# Altium PCB Motor1.PcbDoc (part 1 of 2)
Units mm, origin at the board's own origin, x right, y up, seen from the top; angles counter-clockwise.
Board outline 127 x 101.6 mm, 4 copper layers (Top Layer, Internal Plane 1, Internal Plane 2, Bottom Layer), stack 0.462 mm thick; 168 components, 160 nets, 542 pads, 14 vias.
Unrouted connection lines stored in the file: 162.
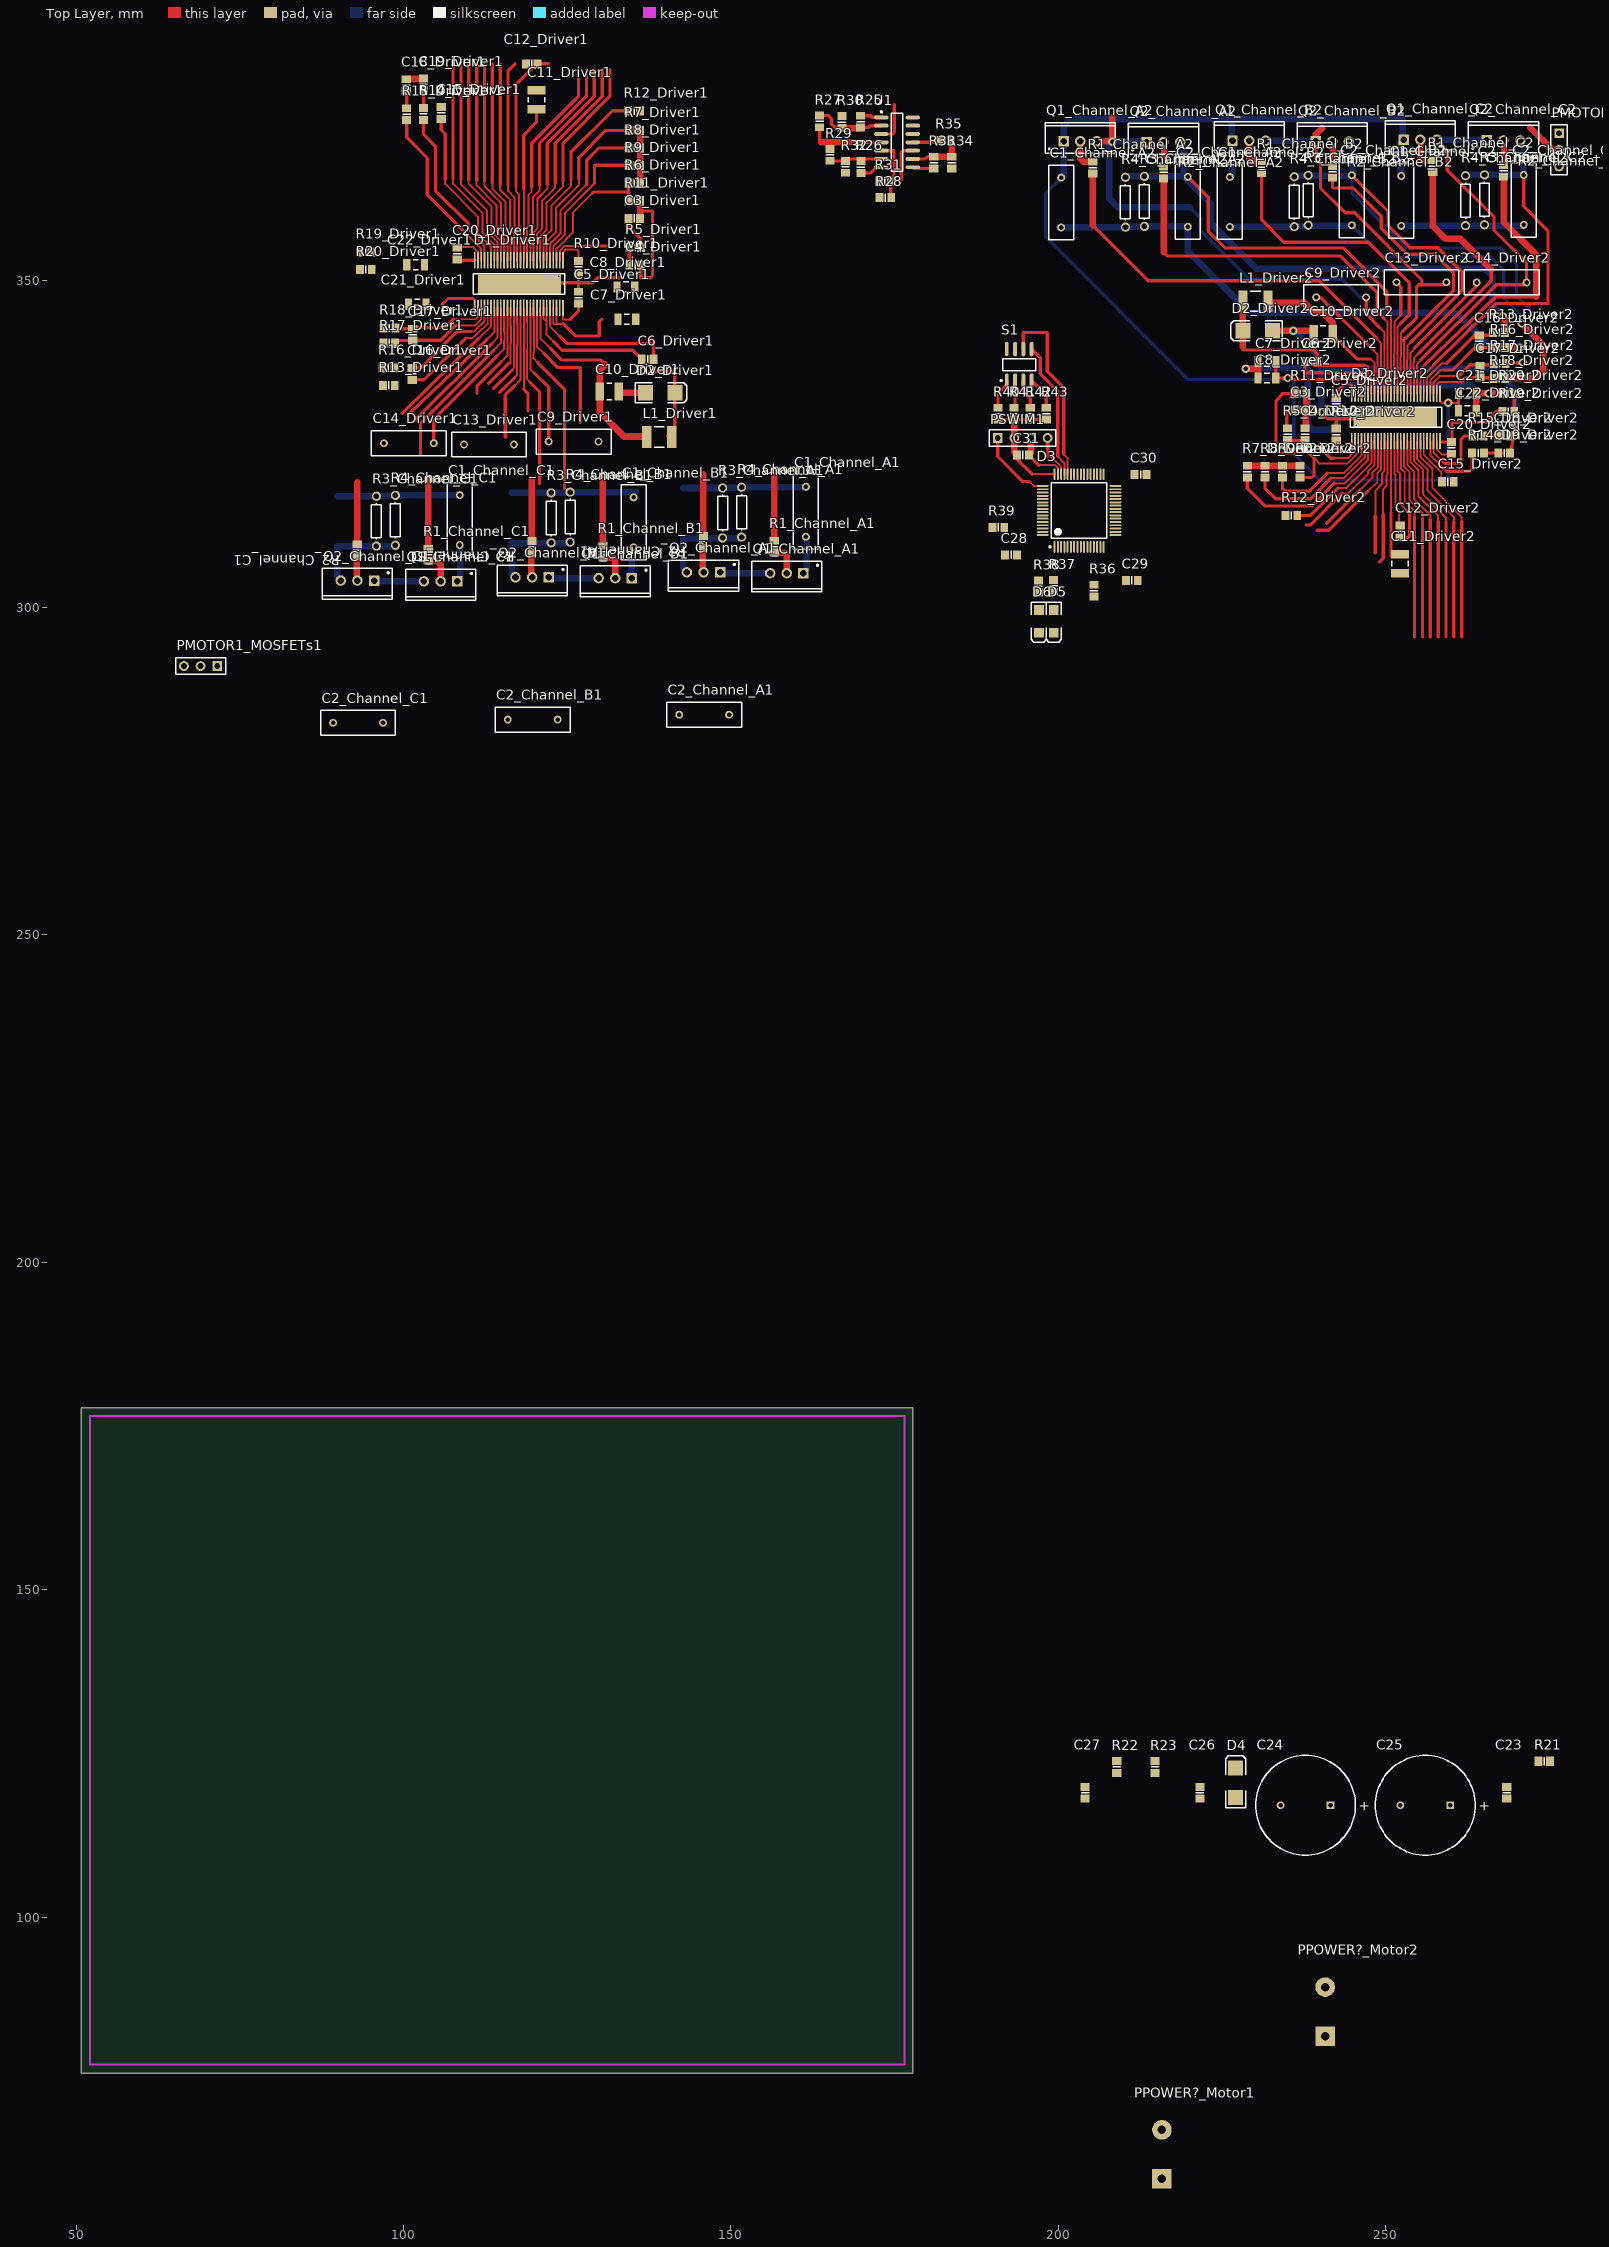
[diagram p0: Top Layer view]
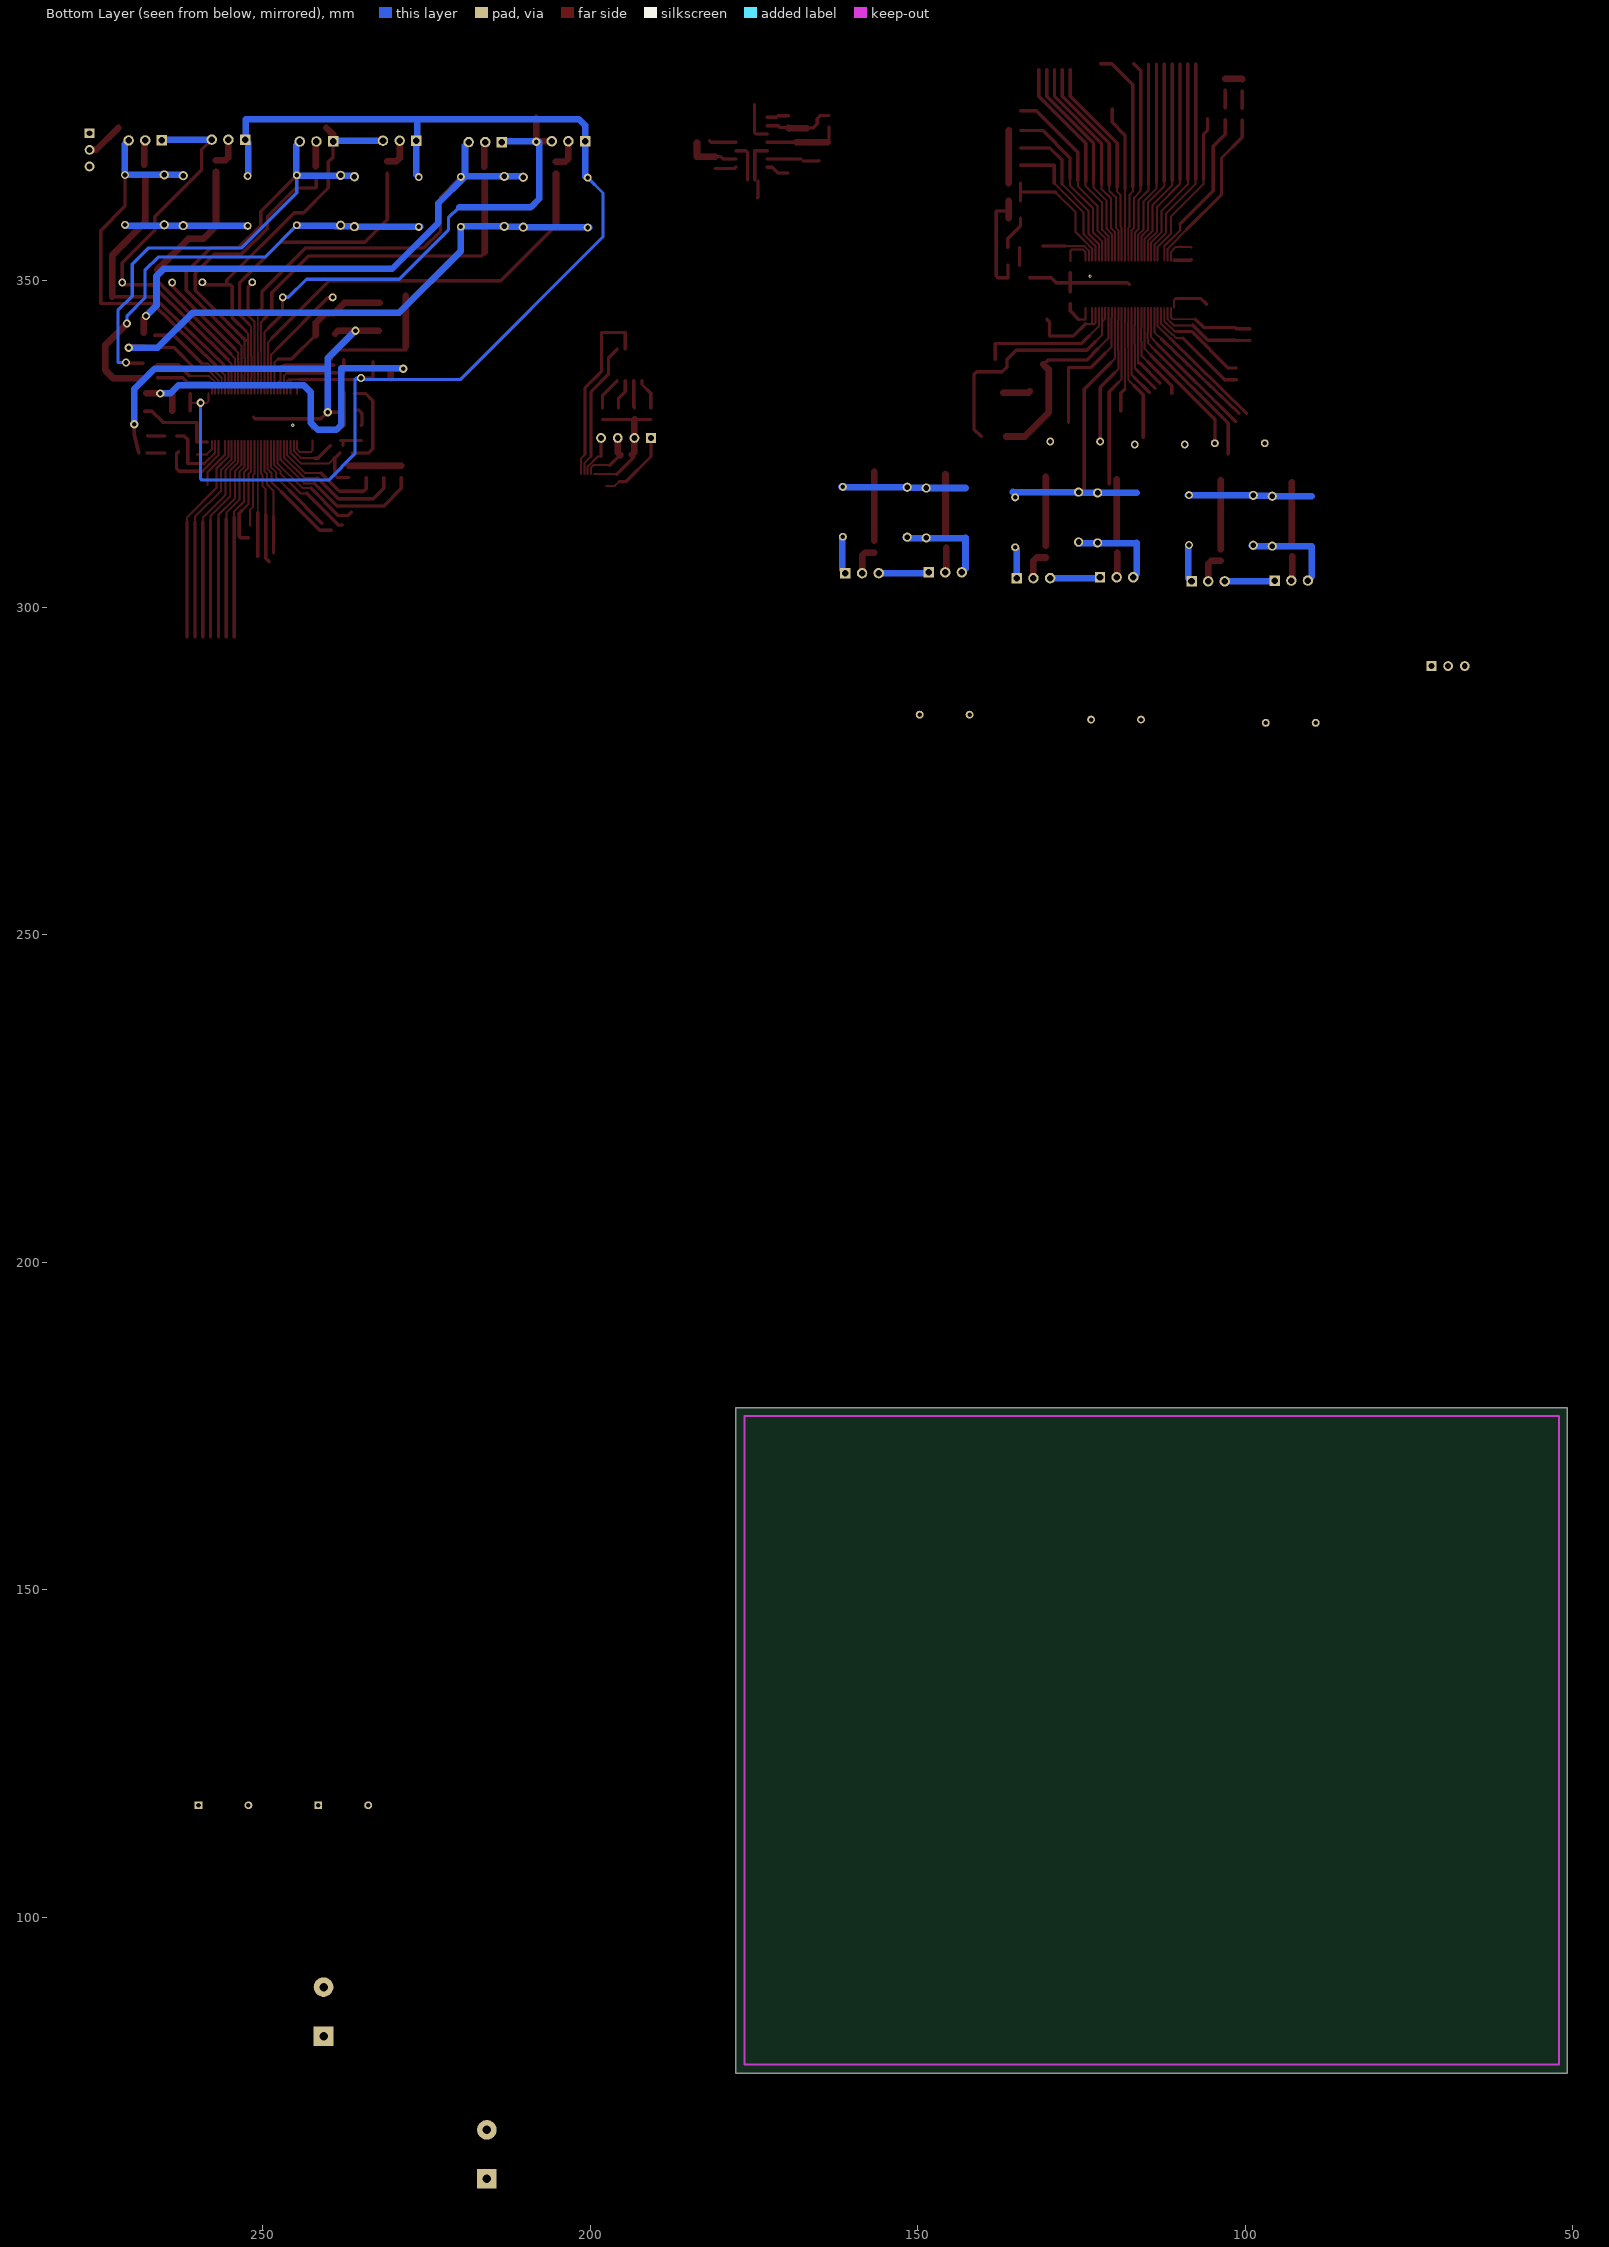
[diagram p1: Bottom Layer view, seen from below]
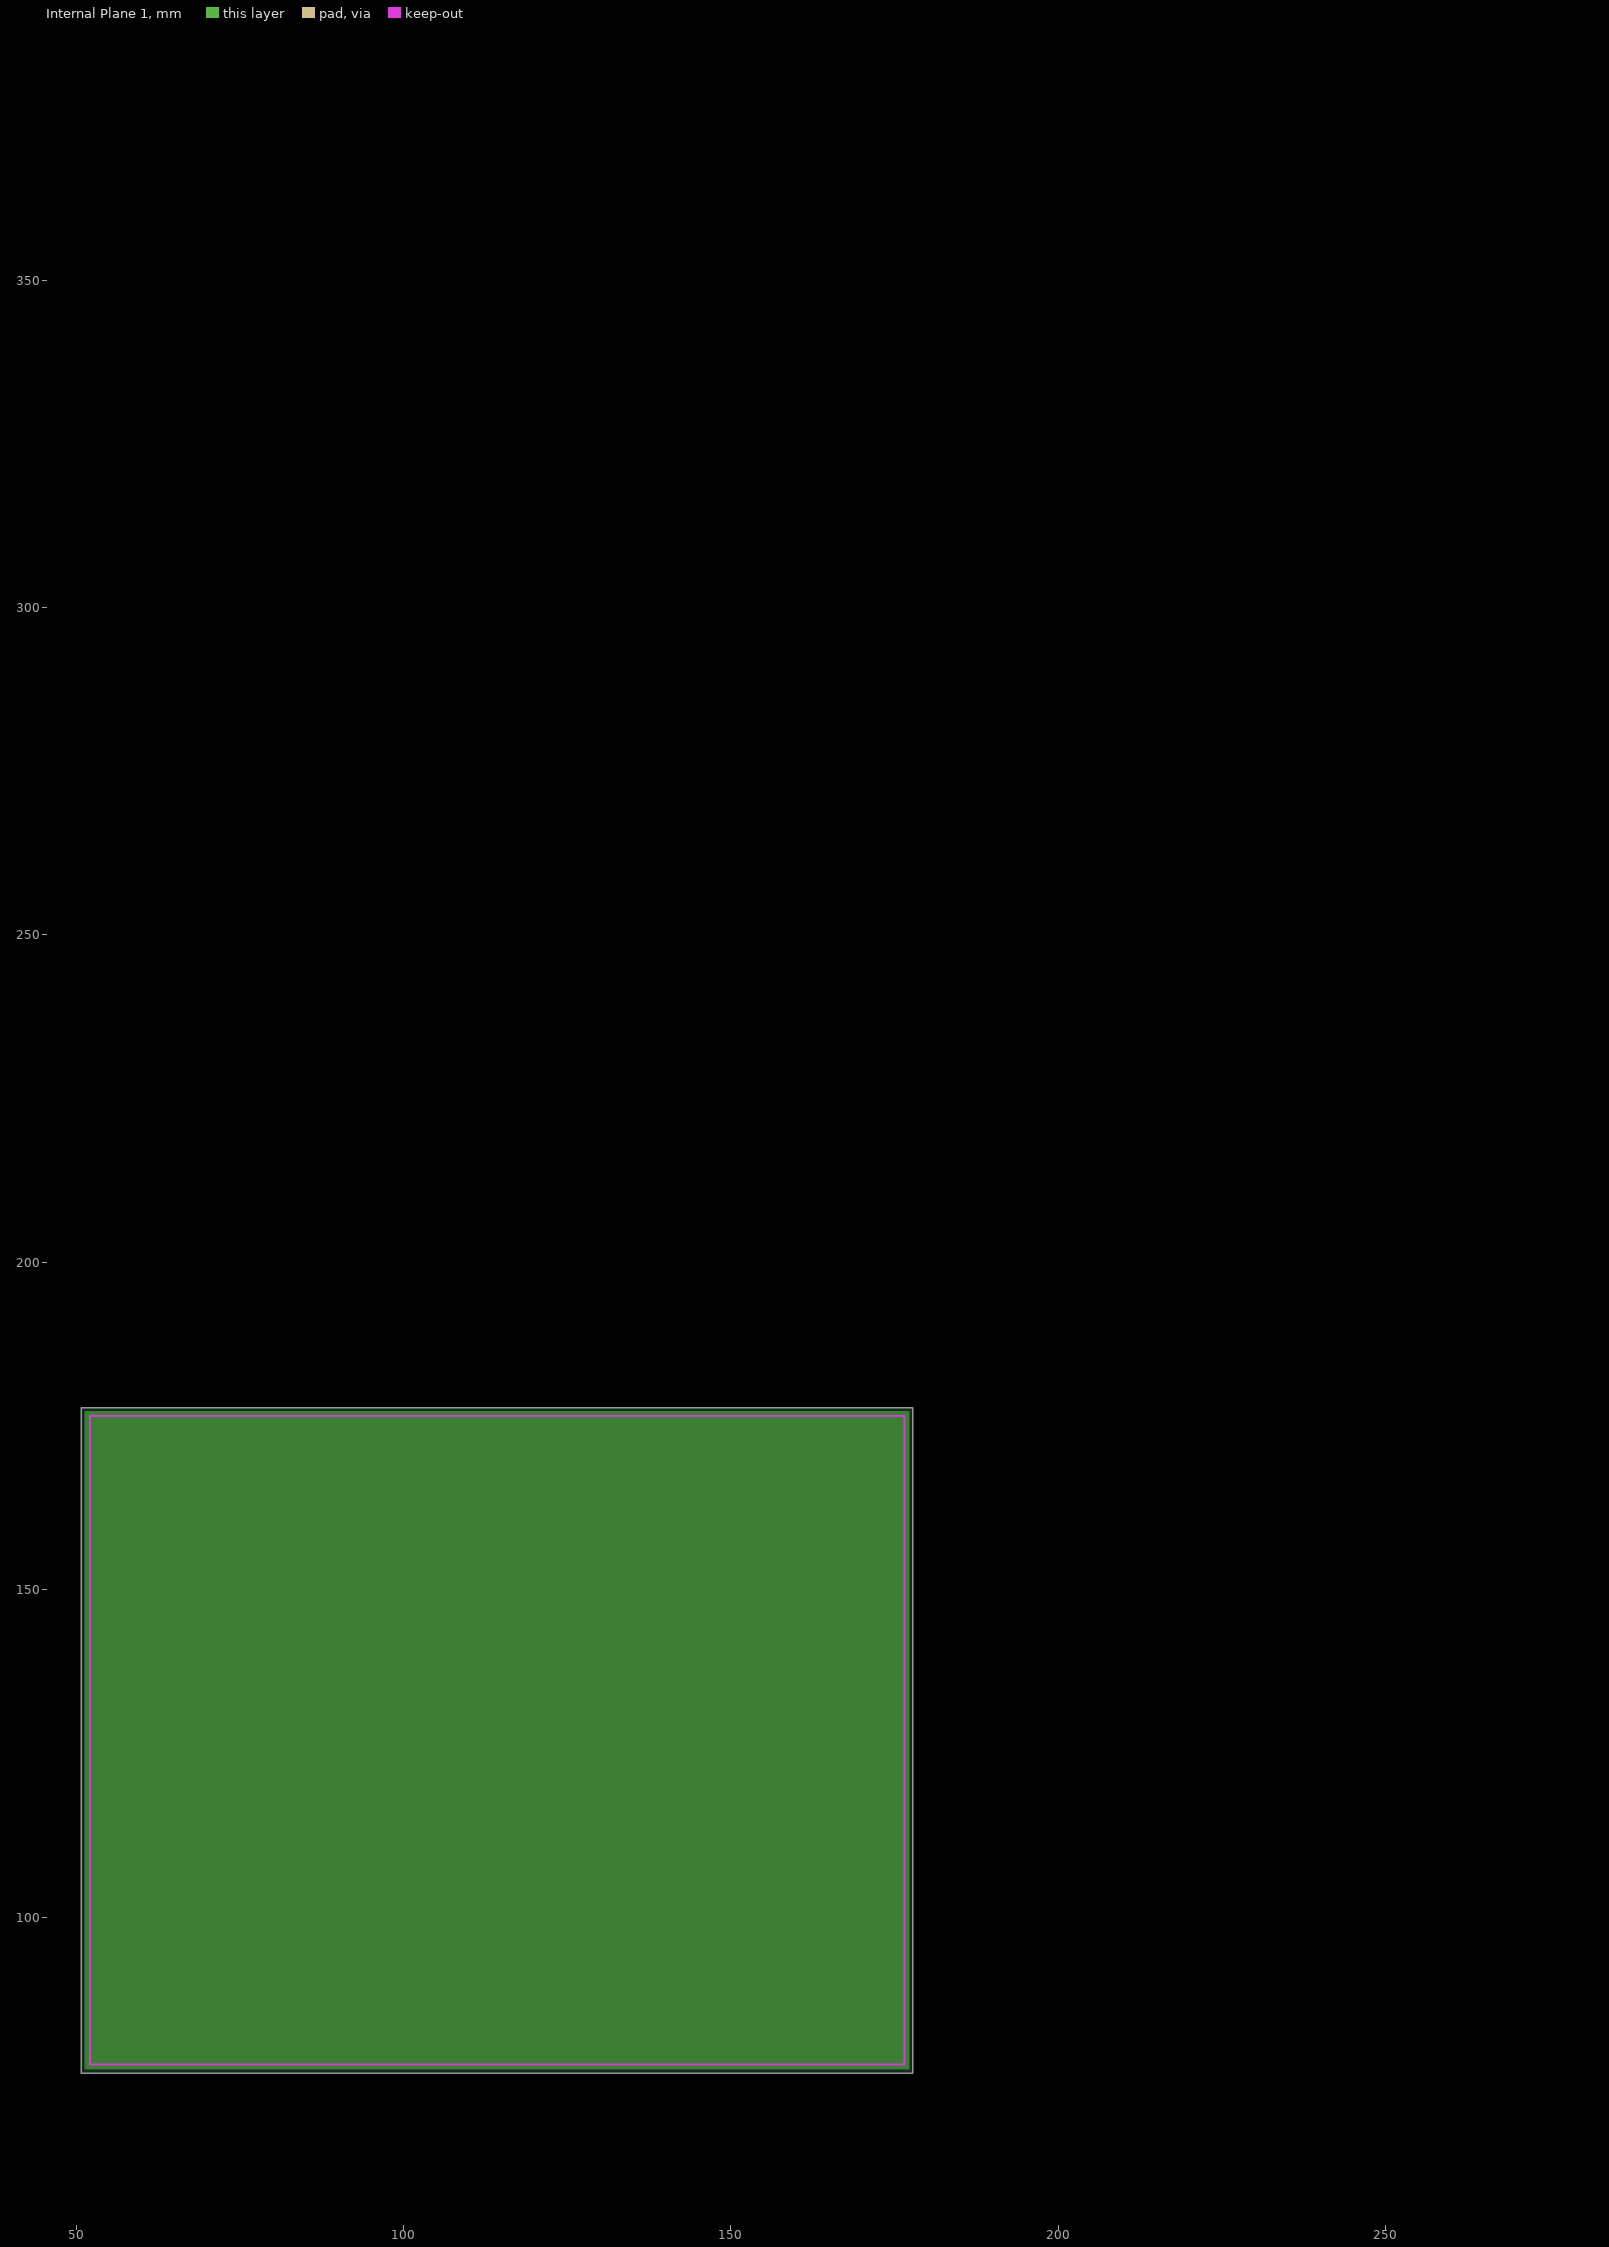
[diagram p2: Internal Plane 1, clearances drawn from the general rule]
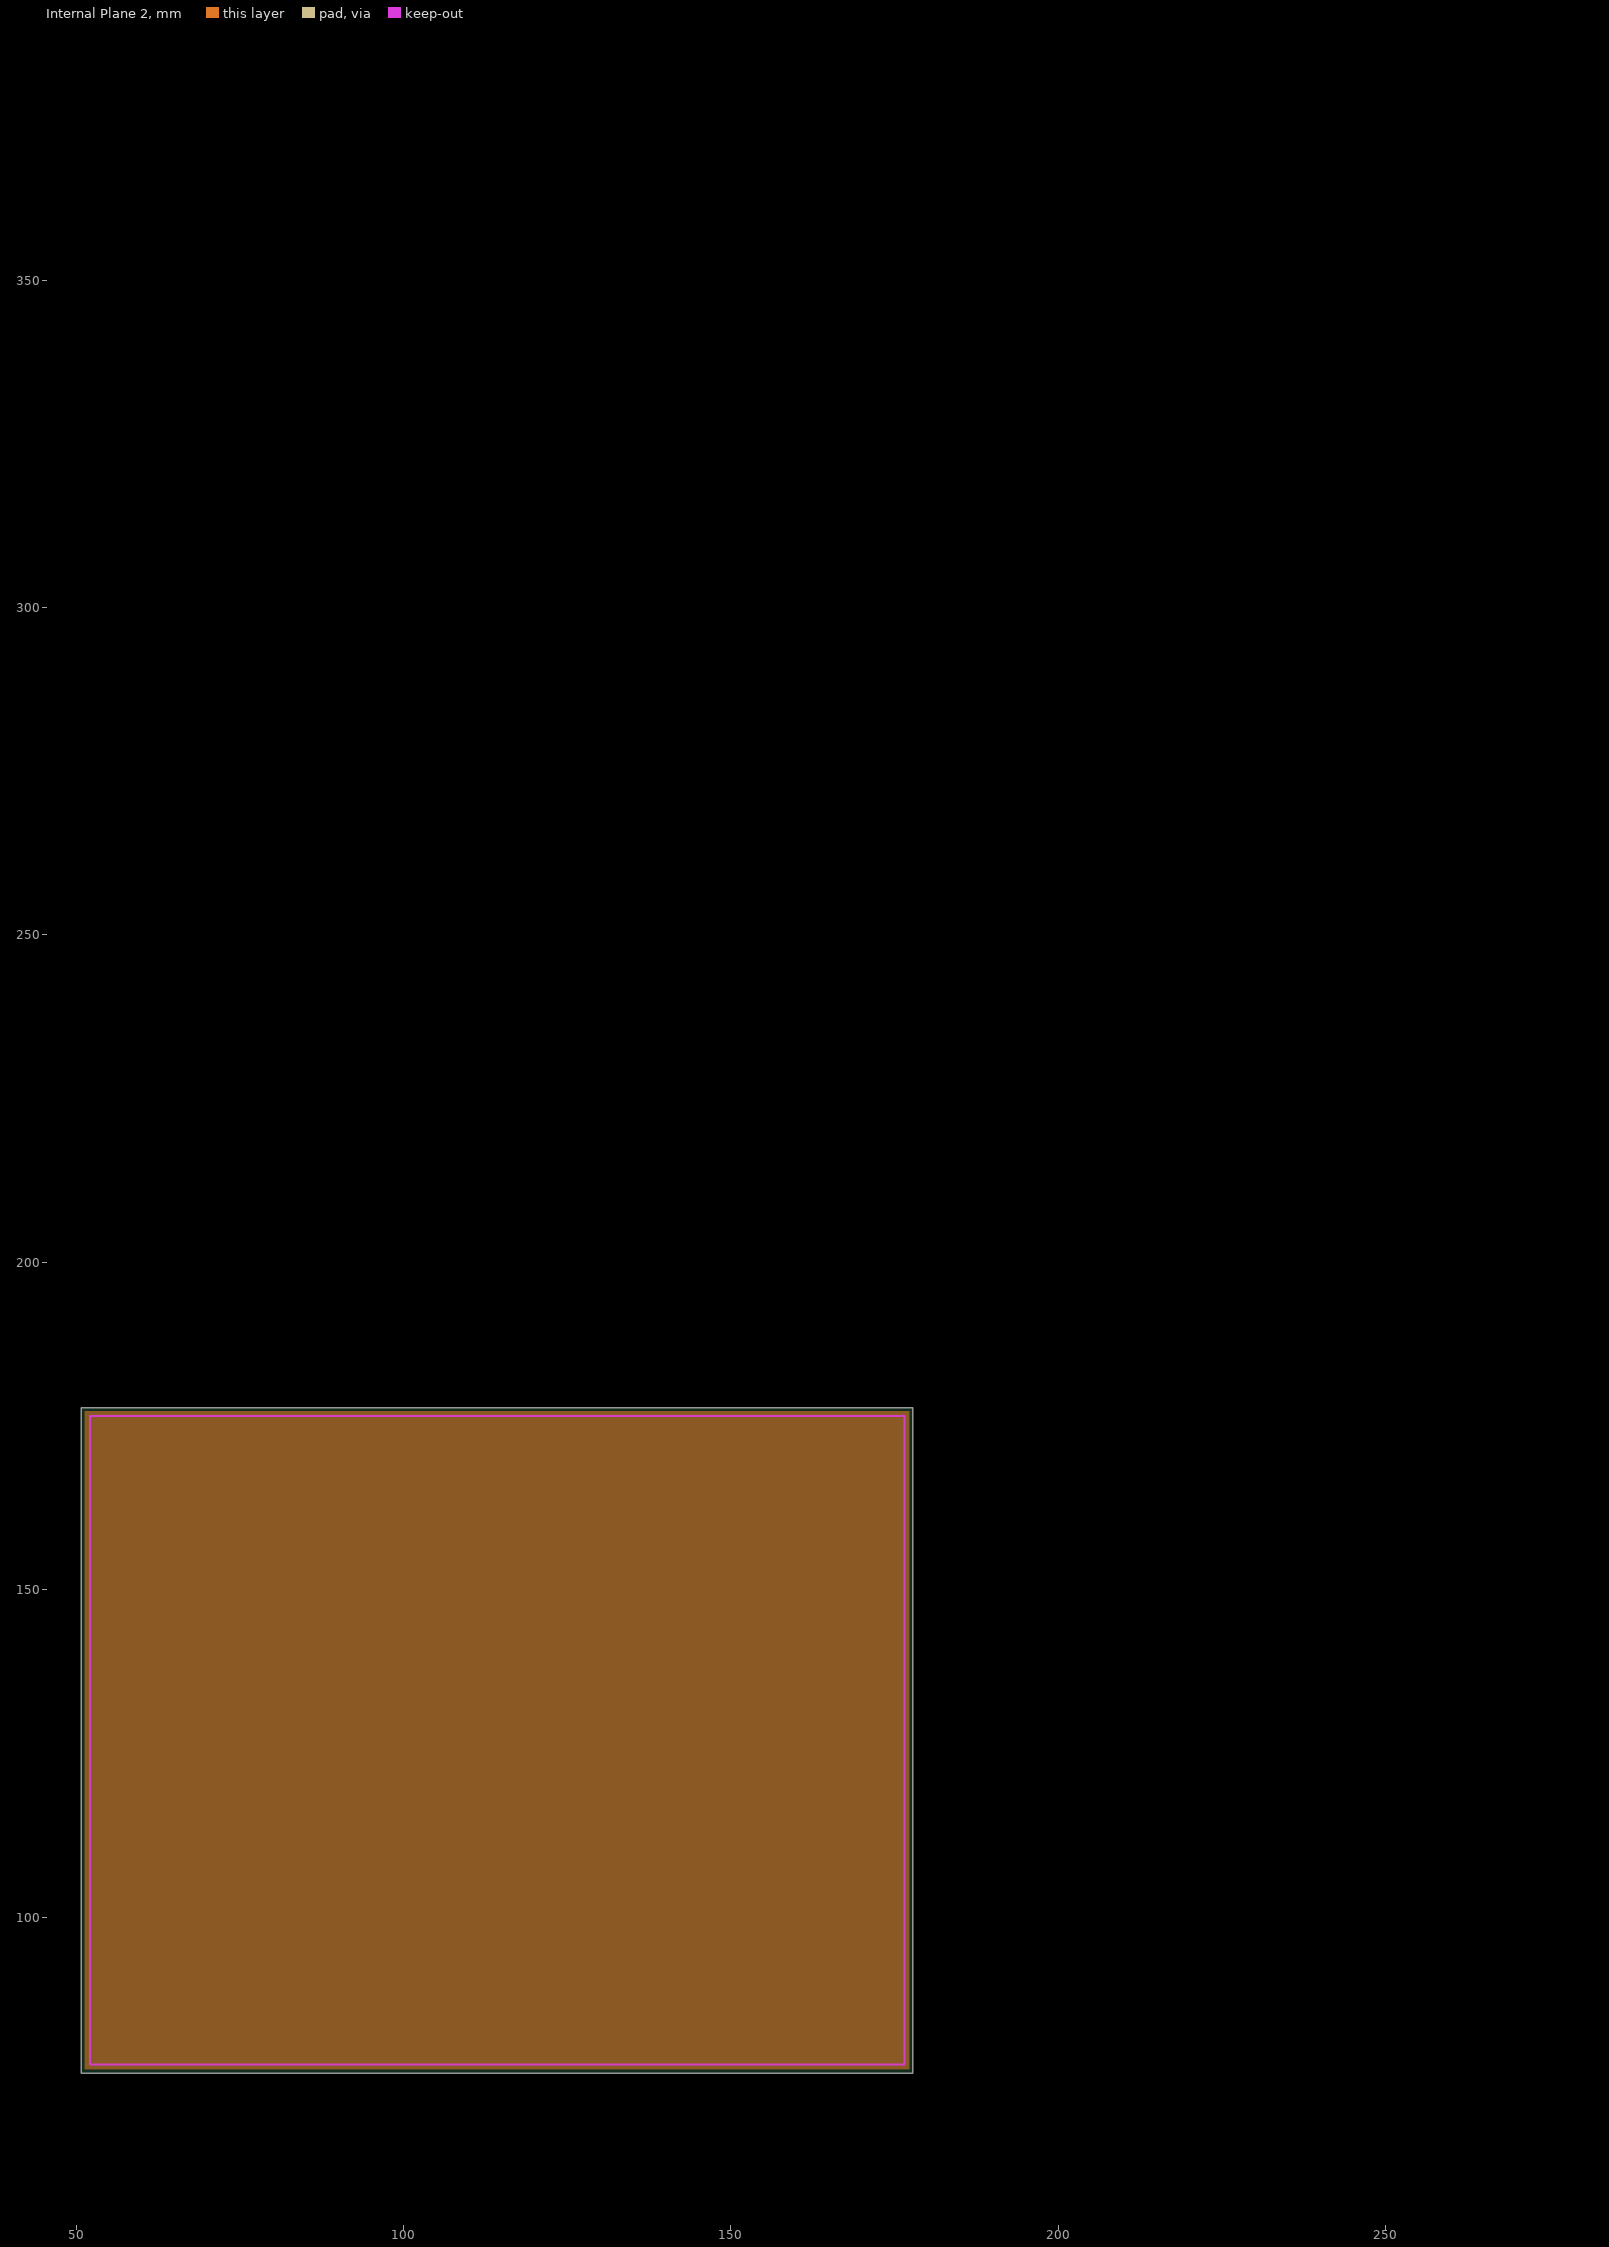
[diagram p3: Internal Plane 2, clearances drawn from the general rule]

## Layer stack, top to bottom
Top Solder: solder mask 0.0102, Solder Resist, Dk 3.5
Top Layer: signal copper 0.0356
Internal Plane 1: plane copper 0.0356
Internal Plane 2: plane copper 0.0356
Dielectric 1: dielectric 0.32, FR-4, Dk 4.8
Bottom Layer: signal copper 0.0356
Bottom Solder: solder mask 0.0102, Solder Resist, Dk 3.5

## Board outline
50.8,76.2 177.8,76.2 177.8,177.8 50.8,177.8

## Design rules (kind name [scope] priority, off if disabled: settings)
Clearance [All] p1: gap=0.1 ignorepadtopadclearanceinfootprint=FALSE
PlaneClearance [All] p1: clearance=0.508
PlaneConnect [All] p1: planeconnectstyle=Relief reliefexpansion=0.508 reliefentries=4 reliefconductorwidth=0.254 reliefairgap=0.254
PolygonConnect [All] p1: connectstyle=Relief reliefconductorwidth=0.254 reliefentries=4 polygonreliefangle="90 Angle" airgapwidth=0.254
RoomDefinition [InComponentClass('Room Definition 1') vs False] p1: confinementstyle=ConfineIn formatcopy=TRUE lockcomponents=FALSE outline 214.625,294.3 214.625,344.4 188.775,344.4 188.775,294.3
RoomDefinition Motor2 [InComponentClass('Motor2')] p2: confinementstyle=ConfineIn formatcopy=TRUE lockcomponents=FALSE outline 178.943,97.917 200.406,97.917 200.406,116.84 178.943,116.84
RoomDefinition Motor1 [InComponentClass('Motor1')] p3: confinementstyle=ConfineIn formatcopy=TRUE lockcomponents=FALSE outline 211.117,55.465 232.072,55.465 232.072,74.388 211.117,74.388
RoomDefinition Power [InComponentClass('Power')] p4: confinementstyle=ConfineIn formatcopy=TRUE lockcomponents=FALSE outline 178.943,109.22 276.606,109.22 276.606,127.508 178.943,127.508
RoomDefinition OPs [InComponentClass('OPs')] p5: confinementstyle=ConfineIn formatcopy=TRUE lockcomponents=FALSE outline 162.375,361.625 185.175,361.625 185.175,379.225 162.375,379.225
RoomDefinition MOSFETs2 [InComponentClass('MOSFETs2')] p6: confinementstyle=ConfineIn formatcopy=TRUE lockcomponents=FALSE outline 273.976,364.711 277.913,364.711 277.913,375.633 273.976,375.633
RoomDefinition MOSFETs1 [InComponentClass('MOSFETs1')] p7: confinementstyle=ConfineIn formatcopy=TRUE lockcomponents=FALSE outline 178.872,186.928 202.875,186.928 202.875,197.85 178.872,197.85
RoomDefinition Driver2 [InComponentClass('Driver2')] p8: confinementstyle=ConfineIn formatcopy=TRUE lockcomponents=FALSE outline 275.745,290.6 275.745,355.15 214.003,355.15 214.003,290.6
RoomDefinition Driver1 [InComponentClass('Driver1')] p9: confinementstyle=ConfineIn formatcopy=TRUE lockcomponents=FALSE outline 91.4,384.261 91.4,317.089 150.359,317.089 150.359,384.261
RoomDefinition Channel_C2 [InComponentClass('Channel_C2')] p10: confinementstyle=ConfineIn formatcopy=TRUE lockcomponents=FALSE outline 249.055,355.067 274.998,355.067 274.998,376.007 249.055,376.007
RoomDefinition Channel_C1 [InComponentClass('Channel_C1')] p11: confinementstyle=ConfineIn formatcopy=TRUE lockcomponents=FALSE outline 111.893,320.35 85.95,320.35 85.95,299.41 111.893,299.41
RoomDefinition Channel_B2 [InComponentClass('Channel_B2')] p12: confinementstyle=ConfineIn formatcopy=TRUE lockcomponents=FALSE outline 222.91,354.911 248.853,354.911 248.853,375.851 222.91,375.851
RoomDefinition Channel_B1 [InComponentClass('Channel_B1')] p13: confinementstyle=ConfineIn formatcopy=TRUE lockcomponents=FALSE outline 138.568,320.85 112.625,320.85 112.625,299.91 138.568,299.91
RoomDefinition Channel_A2 [InComponentClass('Channel_A2')] p14: confinementstyle=ConfineIn formatcopy=TRUE lockcomponents=FALSE outline 197.132,354.825 223.075,354.825 223.075,375.765 197.132,375.765
RoomDefinition Channel_A1 [InComponentClass('Channel_A1')] p15: confinementstyle=ConfineIn formatcopy=TRUE lockcomponents=FALSE outline 164.743,321.6 138.8,321.6 138.8,300.66 164.743,300.66
RoutingVias [All] p1: holewidth=0.6 width=1 viastyle="Through Hole" minholewidth=0.711 minwidth=1.27 maxholewidth=0.711 maxwidth=1.27
SolderMaskExpansion [All] p1: expansion=0.102
Width [All] p1: maxlimit=5 minlimit=0.2 preferedwidth=0.5
28 further rules are at their usual default settings.

## Classes and differential pairs
component class Motor2: PPOWER?_Motor2
component class Motor1: PPOWER?_Motor1
channel class MotorDrv: Motor1 Motor2
channel class MOSFETs: MOSFETs1 MOSFETs2
channel class Drv8301: Driver1 Driver2
channel class Bridge: Channel_A1 Channel_A2 Channel_B1 Channel_B2 Channel_C1 Channel_C2
component class Provisions: D5 D6 PSWIM1 R36 R37 R38 R39 R40 R41 R42 R43 S1
component class Power: C23 C24 C25 C26 C27 C28 C29 C30 C31 D4 R21 R22 R23
component class OPs: R25 R26 R27 R28 R29 R30 R31 R32 R33 R34 R35 U1
component class MOSFETs2: PMOTOR1_MOSFETs2
component class MOSFETs1: PMOTOR1_MOSFETs1
component class Main: D3
component class Driver2: C3_Driver2 C4_Driver2 C5_Driver2 C6_Driver2 C7_Driver2 C8_Driver2 C9_Driver2 C10_Driver2 C11_Driver2 C12_Driver2 C13_Driver2 C14_Driver2 C15_Driver2 C16_Driver2 C17_Driver2 C18_Driver2 C19_Driver2 C20_Driver2 C21_Driver2 C22_Driver2 D1_Driver2 D2_Driver2 L1_Driver2 R5_Driver2 R6_Driver2 R7_Driver2 R8_Driver2 R9_Driver2 R10_Driver2 R11_Driver2 R12_Driver2 R13_Driver2 R14_Driver2 R15_Driver2 R16_Driver2 R17_Driver2 R18_Driver2 R19_Driver2 R20_Driver2
component class Driver1: C3_Driver1 C4_Driver1 C5_Driver1 C6_Driver1 C7_Driver1 C8_Driver1 C9_Driver1 C10_Driver1 C11_Driver1 C12_Driver1 C13_Driver1 C14_Driver1 C15_Driver1 C16_Driver1 C17_Driver1 C18_Driver1 C19_Driver1 C20_Driver1 C21_Driver1 C22_Driver1 D1_Driver1 D2_Driver1 L1_Driver1 R5_Driver1 R6_Driver1 R7_Driver1 R8_Driver1 R9_Driver1 R10_Driver1 R11_Driver1 R12_Driver1 R13_Driver1 R14_Driver1 R15_Driver1 R16_Driver1 R17_Driver1 R18_Driver1 R19_Driver1 R20_Driver1
component class Channel_C2: C1_Channel_C2 C2_Channel_C2 Q1_Channel_C2 Q2_Channel_C2 R1_Channel_C2 R2_Channel_C2 R3_Channel_C2 R4_Channel_C2
component class Channel_C1: C1_Channel_C1 C2_Channel_C1 Q1_Channel_C1 Q2_Channel_C1 R1_Channel_C1 R2_Channel_C1 R3_Channel_C1 R4_Channel_C1
component class Channel_B2: C1_Channel_B2 C2_Channel_B2 Q1_Channel_B2 Q2_Channel_B2 R1_Channel_B2 R2_Channel_B2 R3_Channel_B2 R4_Channel_B2
component class Channel_B1: C1_Channel_B1 C2_Channel_B1 Q1_Channel_B1 Q2_Channel_B1 R1_Channel_B1 R2_Channel_B1 R3_Channel_B1 R4_Channel_B1
component class Channel_A2: C1_Channel_A2 C2_Channel_A2 Q1_Channel_A2 Q2_Channel_A2 R1_Channel_A2 R2_Channel_A2 R3_Channel_A2 R4_Channel_A2
component class Channel_A1: C1_Channel_A1 C2_Channel_A1 Q1_Channel_A1 Q2_Channel_A1 R1_Channel_A1 R2_Channel_A1 R3_Channel_A1 R4_Channel_A1
component class "Room Definition 1": C28 C29 C30 C31 D3 D5 D6 PSWIM1 R36 R37 R38 R39 R40 R41 R42 R43 S1

## Components (designator, comment, footprint, x,y, rotation, side; value= is the part's Value field where it differs from the comment)
C1_Channel_A1 "Cap" RAD-0.3 161.45,314.6 r270 top value="2.2uF 100V" (schematic designator C1)
C1_Channel_A2 "Cap" RAD-0.3 200.425,361.825 r90 top value="2.2uF 100V" (schematic designator C1)
C1_Channel_B1 "Cap" RAD-0.3 135.143,312.995 r270 top value="2.2uF 100V" (schematic designator C1)
C1_Channel_B2 "Cap" RAD-0.3 226.203,361.911 r90 top value="2.2uF 100V" (schematic designator C1)
C1_Channel_C1 "Cap" RAD-0.3 108.6,313.35 r270 top value="2.2uF 100V" (schematic designator C1)
C1_Channel_C2 "Cap" RAD-0.3 252.348,362.067 r90 top value="2.2uF 100V" (schematic designator C1)
C2_Channel_A1 "Cap" RAD-0.3 145.912,283.627 r0 top value=1nF (schematic designator C2)
C2_Channel_A2 "Cap" RAD-0.3 219.773,361.937 r90 top value=1nF (schematic designator C2)
C2_Channel_B1 "Cap" RAD-0.3 119.737,282.877 r0 top value=1nF (schematic designator C2)
C2_Channel_B2 "Cap" RAD-0.3 244.825,362.175 r90 top value=1nF (schematic designator C2)
C2_Channel_C1 "Cap" RAD-0.3 93.062,282.377 r0 top value=1nF (schematic designator C2)
C2_Channel_C2 "Cap" RAD-0.3 271.073,362.227 r90 top value=1nF (schematic designator C2)
C3_Driver1 "Cap" 6-0805_N 135.24,359.416 r0 top value=6800pF (schematic designator C3)
C3_Driver2 "Cap" 6-0805_N 236.945,330.15 r0 top value=6800pF (schematic designator C3)
C4_Driver1 "Cap" 6-0805_N 135.367,352.268 r0 top value=120pF (schematic designator C4)
C4_Driver2 "Cap" 6-0805_N 237.688,326.472 r90 top value=120pF (schematic designator C4)
C5_Driver1 "Cap" 6-0805_N 126.738,347.304 r270 top value=15nF (schematic designator C5)
C5_Driver2 "Cap" 6-0805_N 242.428,331.107 r90 top value=15nF (schematic designator C5)
C6_Driver1 "Cap" 6-0805_N 137.279,337.906 r0 top value=0.1uF (schematic designator C6)
C6_Driver2 "Cap" 6-0805_N 238.62,337.575 r180 top value=0.1uF (schematic designator C6)
C7_Driver1 "Cap" C1206 134.104,344.002 r180 top value=0.1uF (schematic designator C7)
C7_Driver2 "Cap" C1206 231.85,337.55 r0 top value=0.1uF (schematic designator C7)
C8_Driver1 "Cap" C1206 133.977,348.955 r180 top value=2.2uF (schematic designator C8)
C8_Driver2 "Cap" C1206 231.85,335.025 r0 top value=2.2uF (schematic designator C8)
C9_Driver1 "Cap" RAD-0.3 125.976,325.333 r0 top value=220nF (schematic designator C9)
C9_Driver2 "Cap" RAD-0.3 243.17,347.35 r180 top value=220nF (schematic designator C9)
C10_Driver1 "Cap Pol1" C1210_N 131.434,332.981 r0 top value=47uF (schematic designator C10)
C10_Driver2 "Cap Pol1" C1210_N 240.425,341.8 r180 top value=47uF (schematic designator C10)
C11_Driver1 "Cap" C1210_N 120.309,377.506 r270 top value=2.2uF (schematic designator C11)
C11_Driver2 "Cap" C1210_N 252.17,306.7 r90 top value=2.2uF (schematic designator C11)
C12_Driver1 "Cap" 6-0805_N 119.584,383.006 r0 top value=0.022uF (schematic designator C12)
C12_Driver2 "Cap" 6-0805_N 252.22,311.625 r90 top value=0.022uF (schematic designator C12)
C13_Driver1 "Cap" RAD-0.3 113.059,324.881 r0 top value=220nF (schematic designator C13)
C13_Driver2 "Cap" RAD-0.3 255.445,349.65 r180 top value=220nF (schematic designator C13)
C14_Driver1 "Cap" RAD-0.3 100.83,325.079 r0 top value=220nF (schematic designator C14)
C14_Driver2 "Cap" RAD-0.3 267.685,349.625 r180 top value=220nF (schematic designator C14)
C15_Driver1 "Cap" 6-0805_N 105.759,375.506 r270 top value=1uF (schematic designator C15)
C15_Driver2 "Cap" 6-0805_N 259.47,319.2 r180 top value=1uF (schematic designator C15)
C16_Driver1 "Cap" 6-0805_N 101.334,335.656 r270 top value=2.2uF (schematic designator C16)
C16_Driver2 "Cap" 6-0805_N 264.27,340.625 r90 top value=2.2uF (schematic designator C16)
C17_Driver1 "Cap" 6-0805_N 101.409,341.656 r270 top value=2.2uF (schematic designator C17)
C17_Driver2 "Cap" 6-0805_N 264.395,336 r90 top value=2.2uF (schematic designator C17)
C18_Driver1 "Cap" 6-0805_N 100.434,379.756 r270 top value=0.022uF (schematic designator C18)
C18_Driver2 "Cap" 6-0805_N 268.065,326.212 r180 top value=0.022uF (schematic designator C18)
C19_Driver1 "Cap" 6-0805_N 103.059,379.856 r270 top value=0.022uF (schematic designator C19)
C19_Driver2 "Cap" 6-0805_N 268.065,323.587 r180 top value=0.022uF (schematic designator C19)
C20_Driver1 "Cap" 6-0805_N 108.209,354.031 r90 top value=2.2uF (schematic designator C20)
C20_Driver2 "Cap" 6-0805_N 260.045,324.375 r270 top value=2.2uF (schematic designator C20)
C21_Driver1 "Cap" C1206 102.1,346.288 r0 top value=0.1uF (schematic designator C21)
C21_Driver2 "Cap" C1206 262.47,332.675 r180 top value=0.1uF (schematic designator C21)
C22_Driver1 "Cap" C1206 101.859,352.331 r180 top value=2.2uF (schematic designator C22)
C22_Driver2 "Cap" C1206 262.47,330.025 r180 top value=2.2uF (schematic designator C22)
C23 "Cap" 6-0805_N 268.478,118.999 r90 top value=10nF
C24 "Cap Pol1" RB7.6-15 237.744,117.094 r0 top value="220uF 100V"
C25 "Cap Pol1" RB7.6-15 256.032,117.094 r0 top value="220uF 100V"
C26 "Cap" 6-0805_N 221.615,118.999 r90 top value=0.1uF
C27 "Cap" 6-0805_N 204.089,118.999 r90 top value=0.1uF
C28 "Cap" 6-0805_N 192.775,308.025 r0 top value=0.1uF
C29 "Cap" 6-0805_N 211.225,304.125 r180 top value=0.1uF
C30 "Cap" 6-0805_N 212.55,320.3 r180 top value=0.1uF
C31 "Cap" 6-0805_N 194.6,323.3 r180 top value=0.1uF
D1_Driver1 "DRV8301" HTSSOP56 124.371,353.011 r270 top (schematic designator D1)
D1_Driver2 "DRV8301" HTSSOP56 244.795,325.4 r90 top (schematic designator D1)
D2_Driver1 "D Zener" SMB 139.184,332.781 r0 top (schematic designator D2)
D2_Driver2 "D Zener" SMB 230.42,342.25 r180 top (schematic designator D2)
D3 "STM32F103RE" LQFP64_N 203.175,314.8 r90 top
D4 "D Zener" SMB 227.076,120.523 r90 top
D5 "LED2" 3.2X1.6X1.1 199.3,297.875 r270 top
D6 "LED2" 3.2X1.6X1.1 197.025,297.875 r270 top
L1_Driver1 "Inductor" INDC4532 139.059,326.031 r180 top value=22mH (schematic designator L1)
L1_Driver2 "Inductor" INDC4532 230.12,346.75 r0 top value=22mH (schematic designator L1)
PMOTOR1_MOSFETs1 "Header 3" HDR1X3 71.565,291.05 r180 top (schematic designator PMOTOR1)
PMOTOR1_MOSFETs2 "Header 3" HDR1X3 276.475,372.415 r270 top (schematic designator PMOTOR1)
PPOWER?_Motor1 "Header 2" WJ370-02-75 215.816,60.037 r90 top (schematic designator PPOWER?)
PPOWER?_Motor2 "Header 2" WJ370-02-75 240.75,81.825 r90 top (schematic designator PPOWER?)
PSWIM1 "Header 4" HDR1X4 190.745,325.875 r0 top
Q1_Channel_A1 "IRFB4410ZPBF" TO-220AB 158.52,305.232 r180 top (schematic designator Q1)
Q1_Channel_A2 "IRFB4410ZPBF" TO-220AB 203.355,371.193 r0 top (schematic designator Q1)
Q1_Channel_B1 "IRFB4410ZPBF" TO-220AB 132.345,304.482 r180 top (schematic designator Q1)
Q1_Channel_B2 "IRFB4410ZPBF" TO-220AB 229.133,371.279 r0 top (schematic designator Q1)
Q1_Channel_C1 "IRFB4410ZPBF" TO-220AB 105.67,303.982 r180 top (schematic designator Q1)
Q1_Channel_C2 "IRFB4410ZPBF" TO-220AB 255.278,371.435 r0 top (schematic designator Q1)
Q2_Channel_A1 "IRFB4410ZPBF" TO-220AB 145.82,305.359 r180 top (schematic designator Q2)
Q2_Channel_A2 "IRFB4410ZPBF" TO-220AB 216.055,371.066 r0 top (schematic designator Q2)
Q2_Channel_B1 "IRFB4410ZPBF" TO-220AB 119.645,304.609 r180 top (schematic designator Q2)
Q2_Channel_B2 "IRFB4410ZPBF" TO-220AB 241.833,371.152 r0 top (schematic designator Q2)
Q2_Channel_C1 "IRFB4410ZPBF" TO-220AB 92.97,304.109 r180 top (schematic designator Q2)
Q2_Channel_C2 "IRFB4410ZPBF" TO-220AB 267.978,371.308 r0 top (schematic designator Q2)
R1_Channel_A1 "Res2" 6-0805_N 156.625,309.275 r270 top value=10 (schematic designator R1)
R1_Channel_A2 "Res2" 6-0805_N 205.25,367.15 r90 top value=10 (schematic designator R1)
R1_Channel_B1 "Res2" 6-0805_N 130.45,308.525 r270 top value=10 (schematic designator R1)
R1_Channel_B2 "Res2" 6-0805_N 231.028,367.236 r90 top value=10 (schematic designator R1)
R1_Channel_C1 "Res2" 6-0805_N 103.775,308.025 r270 top value=10 (schematic designator R1)
R1_Channel_C2 "Res2" 6-0805_N 257.173,367.392 r90 top value=10 (schematic designator R1)
R2_Channel_A1 "Res2" 6-0805_N 145.8,310 r270 top value=10 (schematic designator R2)
R2_Channel_A2 "Res2" 6-0805_N 216.075,366.425 r90 top value=10 (schematic designator R2)
R2_Channel_B1 "Res2" 6-0805_N 119.625,309.25 r270 top value=10 (schematic designator R2)
R2_Channel_B2 "Res2" 6-0805_N 241.853,366.511 r90 top value=10 (schematic designator R2)
R2_Channel_C1 "Res2" 6-0805_N 92.95,308.75 r270 top value=10 (schematic designator R2)
R2_Channel_C2 "Res2" 6-0805_N 267.998,366.667 r90 top value=10 (schematic designator R2)
R3_Channel_A1 "Res1" AXIAL-0.3 148.725,314.425 r270 top value=2mOm (schematic designator R3)
R3_Channel_A2 "Res1" AXIAL-0.3 213.15,362 r90 top value=2mOm (schematic designator R3)
R3_Channel_B1 "Res1" AXIAL-0.3 122.55,313.675 r270 top value=2mOm (schematic designator R3)
R3_Channel_B2 "Res1" AXIAL-0.3 238.15,362.175 r90 top value=2mOm (schematic designator R3)
R3_Channel_C1 "Res1" AXIAL-0.3 95.875,313.175 r270 top value=2mOm (schematic designator R3)
R3_Channel_C2 "Res1" AXIAL-0.3 265.073,362.242 r90 top value=2mOm (schematic designator R3)
R4_Channel_A1 "Res1" AXIAL-0.3 151.625,314.55 r270 top value=2mOm (schematic designator R4)
R4_Channel_A2 "Res1" AXIAL-0.3 210.25,361.875 r90 top value=2mOm (schematic designator R4)
R4_Channel_B1 "Res1" AXIAL-0.3 125.45,313.8 r270 top value=2mOm (schematic designator R4)
R4_Channel_B2 "Res1" AXIAL-0.3 236.028,361.961 r90 top value=2mOm (schematic designator R4)
R4_Channel_C1 "Res1" AXIAL-0.3 98.775,313.3 r270 top value=2mOm (schematic designator R4)
R4_Channel_C2 "Res1" AXIAL-0.3 262.173,362.117 r90 top value=2mOm (schematic designator R4)
R5_Driver1 "Res2" 6-0805_N 135.367,354.953 r180 top value=16.2kOm (schematic designator R5)
R5_Driver2 "Res2" 6-0805_N 235.003,326.472 r270 top value=16.2kOm (schematic designator R5)
R6_Driver1 "Res2" 6-0805_N 135.24,364.787 r0 top value=31.6kOm (schematic designator R6)
R6_Driver2 "Res2" 6-0805_N 236.919,320.744 r90 top value=31.6kOm (schematic designator R6)
R7_Driver1 "Res2" 6-0805_N 135.24,372.842 r0 top value=10kOm (schematic designator R7)
R7_Driver2 "Res2" 6-0805_N 228.864,320.744 r90 top value=10kOm (schematic designator R7)
R8_Driver1 "Res2" 6-0805_N 135.24,370.157 r0 top value=10kOm (schematic designator R8)
R8_Driver2 "Res2" 6-0805_N 231.549,320.744 r90 top value=10kOm (schematic designator R8)
R9_Driver1 "Res2" 6-0805_N 135.24,367.472 r0 top value=10kOm (schematic designator R9)
R9_Driver2 "Res2" 6-0805_N 234.234,320.744 r90 top value=10kOm (schematic designator R9)
R10_Driver1 "Res2" 6-0805_N 126.722,352.014 r270 top value=205kOm (schematic designator R10)
R10_Driver2 "Res2" 6-0805_N 242.444,326.397 r90 top value=205kOm (schematic designator R10)
R11_Driver1 "Res2" 6-0805_N 135.24,362.101 r180 top value=10kOm (schematic designator R11)
R11_Driver2 "Res2" 6-0805_N 236.945,332.675 r180 top value=10kOm (schematic designator R11)
R12_Driver1 "Res2" 6-0805_N 135.204,375.839 r0 top value=10kOm (schematic designator R12)
R12_Driver2 "Res2" 6-0805_N 235.57,314.05 r180 top value=10kOm (schematic designator R12)
R13_Driver1 "Res2" 6-0805_N 97.759,333.906 r0 top value=100Om (schematic designator R13)
R13_Driver2 "Res2" 6-0805_N 267.295,341.975 r180 top value=100Om (schematic designator R13)
R14_Driver1 "Res2" 6-0805_N 103.059,375.356 r90 top value=10kOm (schematic designator R14)
R14_Driver2 "Res2" 6-0805_N 264.09,323.587 r0 top value=10kOm (schematic designator R14)
R15_Driver1 "Res2" 6-0805_N 100.484,375.331 r90 top value=10kOm (schematic designator R15)
R15_Driver2 "Res2" 6-0805_N 264.065,326.162 r0 top value=10kOm (schematic designator R15)
R16_Driver1 "Res2" 6-0805_N 97.709,336.581 r0 top value=100Om (schematic designator R16)
R16_Driver2 "Res2" 6-0805_N 267.395,339.7 r180 top value=100Om (schematic designator R16)
R17_Driver1 "Res2" 6-0805_N 97.834,340.331 r0 top value=100Om (schematic designator R17)
R17_Driver2 "Res2" 6-0805_N 267.42,337.275 r180 top value=100Om (schematic designator R17)
R18_Driver1 "Res2" 6-0805_N 97.859,342.681 r0 top value=100Om (schematic designator R18)
R18_Driver2 "Res2" 6-0805_N 267.345,334.975 r180 top value=100Om (schematic designator R18)
R19_Driver1 "Res2" 6-0805_N 94.234,354.281 r0 top value=0 (schematic designator R19)
R19_Driver2 "Res2" 6-0805_N 268.72,329.925 r0 top value=0 (schematic designator R19)
R20_Driver1 "Res2" 6-0805_N 94.259,351.606 r0 top value=0 (schematic designator R20)
R20_Driver2 "Res2" 6-0805_N 268.695,332.675 r180 top value=0 (schematic designator R20)
R21 "Res2" 6-0805_N 274.193,123.825 r0 top value=100k
R22 "Res2" 6-0805_N 208.915,122.936 r90 top value=3.3Om
R23 "Res2" 6-0805_N 214.757,122.936 r90 top value=5k
R25 "Res2" 6-0805_N 169.8,374.175 r90 top value=10
R26 "Res2" 6-0805_N 169.85,367.25 r270 top value=10
R27 "Res2" 6-0805_N 163.55,374.225 r270 top value=10
R28 "Res2" 6-0805_N 173.575,362.575 r180 top value=10
R29 "Res2" 6-0805_N 165.125,369.1 r90 top value=10
R30 "Res2" 6-0805_N 166.95,374.125 r270 top value=10
R31 "Res2" 6-0805_N 173.525,365.075 r0 top value=10
R32 "Res2" 6-0805_N 167.5,367.275 r90 top value=10
R33 "Res2" 6-0805_N 180.975,367.925 r270 top value=10
R34 "Res2" 6-0805_N 183.725,367.925 r270 top value=10
R35 "Res2" 6-0805_N 182.725,371.3 r0 top value=10
R36 "Res2" 6-0805_N 205.425,302.575 r90 top value=100K
R37 "Res21" 6-0805_N 199.275,303.3 r90 top value=4K7
R38 "Res2" 6-0805_N 196.95,303.2 r90 top value=4K7
R39 "Res2" 6-0805_N 190.85,312.225 r0 top value=100K
R40 "Res2" 6-0805_N 190.8,329.6 r270 top value=4K7
R41 "Res2" 6-0805_N 193.25,329.6 r270 top value=4K7
R42 "Res2" 6-0805_N 195.7,329.6 r270 top value=4K7
R43 "Res2" 6-0805_N 198.15,329.6 r270 top value=4K7
S1 "SW DIP-4" SO8_N 194.025,337.05 r90 top
U1 "LM324AD" 751A-02_N 175.375,371.025 r0 top

## Footprints (in the part's own frame and the unit in brackets; to place one, negate y for a bottom-side part, rotate by r counter-clockwise, add the part's x,y. Pads: shape width x height; smd on the part's side, far side on the other; paste and mask are expansions set on the pad)
3.2X1.6X1.1 [mm] "SMT LED; 2 Flat Leads"
  rect 1.5x1.5 smd: 1(-1.75,0) 2(1.75,0)
  silkscreen extent -2.9,-1.15 3.2,1.15
6-0805_N [mm] "Chip Resistor, Body 2.0x1.2mm, IPC Medium Density"
  rect 1.2x1.4 smd: 1(-0.9,0) 2(0.9,0)
  silkscreen extent 0,-0.6 0,0.6, body extent -1.07,-0.7 1.07,0.7, height 0.7
751A-02_N [mm]
  oval 2.2x0.6 smd: 1(-2.4,3.81) 2(-2.4,2.54) 3(-2.4,1.27) 4(-2.4,0) 5(-2.4,-1.27) 6(-2.4,-2.54) 7(-2.4,-3.81) 8(2.4,-3.81) 9(2.4,-2.54) 10(2.4,-1.27) 11(2.4,0) 12(2.4,1.27) 13(2.4,2.54) 14(2.4,3.81)
  silkscreen extent -2.52,-4.4 0.9,4.78, body extent -1.95,-4.33 1.95,4.33, height 1.75
AXIAL-0.3 [mm] "Axial Device, Thru-Hole; 2 Leads; 0.3 in Pin Spacing"
  round 1.4 hole 0.85: 1(-3.81,0) 2(3.81,0)
  silkscreen extent -2.77,-0.76 2.77,0.76
C1206 [mm] "Chip Capacitor, Body 3.2x1.6mm, IPC High Density"
  rect 1.1x1.7 smd: 1(-1.35,0) 2(1.35,0)
  silkscreen extent -0.4,-0.75 0.4,0.75, body extent -1.7,-0.9 1.7,0.9, height 1.3
C1210_N [mm] "Chip Capacitor, Body 3.2x2.5mm, IPC Medium Density"
  rect 1.3x2.7 smd: 1(-1.45,0) 2(1.45,0)
  silkscreen extent -0.4,-1.25 0.4,1.25, body extent -1.7,-1.35 1.7,1.35, height 1.5
HDR1X3 [mm] "Connector; Header; 3 Position"
  rect 1.5x1.5 hole 0.9: 1(0,0)
  round 1.5 hole 0.9: 2(2.54,0) 3(5.08,0)
  silkscreen extent -1.27,-1.27 6.35,1.27
HDR1X4 [mm] "Connector; Header; 4 Position"
  rect 1.5x1.5 hole 0.9: 1(0,0)
  round 1.5 hole 0.9: 2(2.54,0) 3(5.08,0) 4(7.62,0)
  silkscreen extent -1.27,-1.27 8.89,1.27
HTSSOP56 [mm]
  rect 2.5x0.27 smd: 1(0,0)
  oval 2.5x0.27 smd: 2(0,-0.5) 3(0,-1) 4(0,-1.5) 5(0,-2) 6(0,-2.5) 7(0,-3) 8(0,-3.5) 9(0,-4) 10(0,-4.5) 11(0,-5) 12(0,-5.5) 13(0,-6) 14(0,-6.5) 15(0,-7) 16(0,-7.5) 17(0,-8) 18(0,-8.5) 19(0,-9) 20(0,-9.5) 21(0,-10) 22(0,-10.5) 23(0,-11) 24(0,-11.5) 25(0,-12) 26(0,-12.5) 27(0,-13) 28(0,-13.5) 29(7.25,-13.5) 30(7.25,-13) 31(7.25,-12.5) 32(7.25,-12) 33(7.25,-11.5) 34(7.25,-11) 35(7.25,-10.5) 36(7.25,-10) 37(7.25,-9.5) 38(7.25,-9) 39(7.25,-8.5) 40(7.25,-8) 41(7.25,-7.5) 42(7.25,-7) 43(7.25,-6.5) 44(7.25,-6) 45(7.25,-5.5) 46(7.25,-5) 47(7.25,-4.5) 48(7.25,-4) 49(7.25,-3.5) 50(7.25,-3) 51(7.25,-2.5) 52(7.25,-2) 53(7.25,-1.5) 54(7.25,-1) 55(7.25,-0.5) 56(7.25,0)
  rect 3x12.703 smd paste-1.5: 57(3.675,-6.65)
  silkscreen extent 2.08,-13.75 5.17,0.25
INDC4532 [mm] "Chip Inductor, Body 4.5x3.2mm, IPC High Density"
  rect 1.4x3.3 smd: 1(-1.9,0) 2(1.9,0)
  silkscreen extent -0.8,-1.55 0.8,1.55, body extent -2.4,-1.7 2.4,1.7, height 0.55
LQFP64_N [mm] "Thin QFP, 64-Leads, Body 10x10mm, Pitch 0.5mm, IPC Medium Density"
  oval 1.8x0.3 smd: 1(-5.55,3.75) 2(-5.55,3.25) 3(-5.55,2.75) 4(-5.55,2.25) 5(-5.55,1.75) 6(-5.55,1.25) 7(-5.55,0.75) 8(-5.55,0.25) 9(-5.55,-0.25) 10(-5.55,-0.75) 11(-5.55,-1.25) 12(-5.55,-1.75) 13(-5.55,-2.25) 14(-5.55,-2.75) 15(-5.55,-3.25) 16(-5.55,-3.75) 33(5.55,-3.75) 34(5.55,-3.25) 35(5.55,-2.75) 36(5.55,-2.25) 37(5.55,-1.75) 38(5.55,-1.25) 39(5.55,-0.75) 40(5.55,-0.25) 41(5.55,0.25) 42(5.55,0.75) 43(5.55,1.25) 44(5.55,1.75) 45(5.55,2.25) 46(5.55,2.75) 47(5.55,3.25) 48(5.55,3.75)
  oval 0.3x1.8 smd: 17(-3.75,-5.55) 18(-3.25,-5.55) 19(-2.75,-5.55) 20(-2.25,-5.55) 21(-1.75,-5.55) 22(-1.25,-5.55) 23(-0.75,-5.55) 24(-0.25,-5.55) 25(0.25,-5.55) 26(0.75,-5.55) 27(1.25,-5.55) 28(1.75,-5.55) 29(2.25,-5.55) 30(2.75,-5.55) 31(3.25,-5.55) 32(3.75,-5.55) 49(3.75,5.55) 50(3.25,5.55) 51(2.75,5.55) 52(2.25,5.55) 53(1.75,5.55) 54(1.25,5.55) 55(0.75,5.55) 56(0.25,5.55) 57(-0.25,5.55) 58(-0.75,5.55) 59(-1.25,5.55) 60(-1.75,5.55) 61(-2.25,5.55) 62(-2.75,5.55) 63(-3.25,5.55) 64(-3.75,5.55)
  silkscreen extent -5.67,-4.25 4.25,4.57, body extent -5,-5 5,5, height 1.6
RAD-0.3 [mm] "Radial Cap, Thru-Hole; 2 Leads; 0.3 in Pin Spacing"
  round 1.2 hole 0.7: 1(-3.81,0) 2(3.81,0)
  silkscreen extent -5.71,-1.91 5.71,1.91
RB7.6-15 [mm] "Polarized Capacitor (Radial); 2 Leads"
  rect 1.2x1.2 hole 0.7: 1(3.81,0)
  round 1.2 hole 0.7: 2(-3.81,0)
  silkscreen extent -7.62,-7.62 7.62,7.62
SMB [mm] "DO-214-AA/SMB; 2 C-Bend Leads; Body 5.3 x 3.6 mm, inc. leads (LxW)"
  rect 2.3x2.3 smd: 1(-2.25,0) 2(2.25,0)
  silkscreen extent -3.8,-1.55 4.1,1.55
SO8_N [mm] "SOIC, 8-Leads, Body 4.9x3.9mm, Pitch 1.27mm, IPC Medium Density"
  oval 2.2x0.6 smd: 1(-2.4,1.905) 2(-2.4,0.635) 3(-2.4,-0.635) 4(-2.4,-1.905) 5(2.4,-1.905) 6(2.4,-0.635) 7(2.4,0.635) 8(2.4,1.905)
  silkscreen extent -2.52,-2.5 0.9,2.88, body extent -2,-2.5 2,2.5, height 1.75
TO-220AB [mm] "TO, Thru-Hole, Vertical, Heatsink Mounted; 3 In-Line Leads; Pitch 2.54 mm"
  rect 1.6x1.6 hole 1: 1(-2.54,0)
  round 1.6 hole 1: 2(0,0) 3(2.54,0)
  silkscreen extent -5.35,-1.85 5.35,2.85, body extent -5.4,-1.9 5.4,2.9, height 19.3
WJ370-02-75 [mm]
  rect 3x3 hole 1.3: 1(0,0)
  round 3 hole 1.3: 2(7.5,0)

## Part data
C1_Channel_A1 C1_Channel_A2 C1_Channel_B1 C1_Channel_B2 C1_Channel_C1 C1_Channel_C2 C2_Channel_A1 C2_Channel_A2 C2_Channel_B1 C2_Channel_B2 C2_Channel_C1 C2_Channel_C2 C3_Driver1 C3_Driver2 C4_Driver1 C4_Driver2 C5_Driver1 C5_Driver2 C6_Driver1 C6_Driver2 C7_Driver1 C7_Driver2 C8_Driver1 C8_Driver2 C9_Driver1 C9_Driver2 C11_Driver1 C11_Driver2 C12_Driver1 C12_Driver2 C13_Driver1 C13_Driver2 C14_Driver1 C14_Driver2 C15_Driver1 C15_Driver2 C16_Driver1 C16_Driver2 C17_Driver1 C17_Driver2 C18_Driver1 C18_Driver2 C19_Driver1 C19_Driver2 C20_Driver1 C20_Driver2 C21_Driver1 C21_Driver2 C23 C26 C27 C28 C29 C30 C31: "Capacitor", LatestRevisionDate=17-Jul-2002, LatestRevisionNote="Re-released for DXP Platform.", PackageDescription="Radial Cap, Thru-Hole; 2 Leads; 0.3 in Pin Spacing", PackageReference=RAD-0.3, Published=8-Jun-2000, Publisher="Altium Limited"
  C12_Driver1 C12_Driver2 C21_Driver1 C21_Driver2: REF=http://kosmodrom.com.ua/el.php?name=CAP-CERAMIC-Y2-0.01-250
C10_Driver1 C10_Driver2 C24 C25: "Polarized Capacitor (Radial)", LatestRevisionDate=17-Jul-2002, LatestRevisionNote="Re-released for DXP Platform.", PackageDescription="Polarized Capacitor (Radial); 2 Leads", PackageReference=RB7.6-15, Published=8-Jun-2000, Publisher="Altium Limited"
C22_Driver1 C22_Driver2: "ECAP-NOPOLAR-4,7mkf", LatestRevisionDate=17-Jul-2002, LatestRevisionNote="Re-released for DXP Platform.", PackageDescription="Radial Cap, Thru-Hole; 2 Leads; 0.3 in Pin Spacing", PackageReference=RAD-0.3, Published=8-Jun-2000, Publisher="Altium Limited", REF=http://kosmodrom.com.ua/el.php?name=ECAP4.7MKF100VNP5X11
D1_Driver1 D1_Driver2: "DRV8301 Three-Phase Gate Driver With Dual Current Shunt Amplifiers  and Buck Regulator", Supplier Part Number 1=DRV8301QDCARQ1-ND, Supplier 1=Digi-Key
D2_Driver1 D2_Driver2 D4: "Zener Diode", LatestRevisionDate=17-Jul-2002, LatestRevisionNote="Re-released for DXP Platform.", PackageDescription="Diode, Thru-Hole; 2 Leads; 0.7 in Pin Spacing", PackageReference=DIODE-0.7, Published=8-Jun-2000, Publisher="Altium Limited"
D3: "High-density performance line ARM®-based 32-bit MCU with 256 to 512KB  Flash, USB, CAN, 11 timers, 3 ADCs, 13 communication interfaces"
D5 D6: "Typical RED, GREEN, YELLOW, AMBER GaAs LED", LatestRevisionDate=17-Jul-2002, LatestRevisionNote="Re-released for DXP Platform.", PackageDescription="SM LED; 2 Flat Leads", PackageReference=3.2X1.6X1.1, PackageVersion=Feb-2002, Published=8-Jun-2000, Publisher="Altium Limited"
  D6: Link=http://voron.ua/catalog/019503, Price=1.29
PMOTOR1_MOSFETs1 PMOTOR1_MOSFETs2: "Header, 3-Pin", LatestRevisionDate=17-Jul-2002, LatestRevisionNote="Re-released for DXP Platform.", Publisher="Altium Limited"
PPOWER?_Motor1 PPOWER?_Motor2: "Header, 2-Pin", LatestRevisionDate=17-Jul-2002, LatestRevisionNote="Re-released for DXP Platform.", Publisher="Altium Limited"
PSWIM1: "Header, 4-Pin", LatestRevisionDate=17-Jul-2002, LatestRevisionNote="Re-released for DXP Platform.", Publisher="Altium Limited"
Q1_Channel_A1 Q1_Channel_A2 Q1_Channel_B1 Q1_Channel_B2 Q1_Channel_C1 Q1_Channel_C2 Q2_Channel_A1 Q2_Channel_A2 Q2_Channel_B1 Q2_Channel_B2 Q2_Channel_C1 Q2_Channel_C2: library part MOSFET-N, LatestRevisionDate=17-Jul-2002, LatestRevisionNote="Re-released for DXP Platform.", PackageDescription="TO, Flat Index; 3 In-Line, Axial Leads; Body Dia. 4.6mm; Lead Dia. 0.5 mm (max)", PackageReference=E3, PackageVersion=1995/1996, Published=8-Jun-2000, Publisher="Altium Limited"
R1_Channel_A1 R1_Channel_A2 R1_Channel_B1 R1_Channel_B2 R1_Channel_C1 R1_Channel_C2 R2_Channel_A1 R2_Channel_A2 R2_Channel_B1 R2_Channel_B2 R2_Channel_C1 R2_Channel_C2 R3_Channel_A1 R3_Channel_A2 R3_Channel_B1 R3_Channel_B2 R3_Channel_C1 R3_Channel_C2 R4_Channel_A1 R4_Channel_A2 R4_Channel_B1 R4_Channel_B2 R4_Channel_C1 R4_Channel_C2 R5_Driver1 R5_Driver2 R6_Driver1 R6_Driver2 R7_Driver1 R7_Driver2 R8_Driver1 R8_Driver2 R9_Driver1 R9_Driver2 R10_Driver1 R10_Driver2 R11_Driver1 R11_Driver2 R12_Driver1 R12_Driver2 R13_Driver1 R13_Driver2 R14_Driver1 R14_Driver2 R15_Driver1 R15_Driver2 R16_Driver1 R16_Driver2 R17_Driver1 R17_Driver2 R18_Driver1 R18_Driver2 R19_Driver1 R19_Driver2 R20_Driver1 R20_Driver2 R21 R22 R23 R25 R26 R27 R28 R29 R30 R31 R32 R33 R34 R35 R36 R38 R39 R40 R41 R42 R43: "Resistor", LatestRevisionDate=17-Jul-2002, LatestRevisionNote="Re-released for DXP Platform.", Published=8-Jun-2000, Publisher="Altium Limited"
  R1_Channel_A1 R1_Channel_A2 R1_Channel_B1 R1_Channel_B2 R1_Channel_C1 R1_Channel_C2 R2_Channel_A1 R2_Channel_A2 R2_Channel_B1 R2_Channel_B2 R2_Channel_C1 R2_Channel_C2 R5_Driver1 R5_Driver2 R6_Driver1 R6_Driver2 R7_Driver1 R7_Driver2 R8_Driver1 R8_Driver2 R9_Driver1 R9_Driver2 R10_Driver1 R10_Driver2 R11_Driver1 R11_Driver2 R12_Driver1 R12_Driver2 R13_Driver1 R13_Driver2 R14_Driver1 R14_Driver2 R15_Driver1 R15_Driver2 R16_Driver1 R16_Driver2 R17_Driver1 R17_Driver2 R18_Driver1 R18_Driver2 R19_Driver1 R19_Driver2 R20_Driver1 R20_Driver2 R21 R22 R23 R25 R26 R27 R28 R29 R30 R31 R32 R33 R34 R35 R36 R38 R39 R40 R41 R42 R43: PackageDescription="Axial Device, Thru-Hole; 2 Leads; 0.4 in Pin Spacing", PackageReference=AXIAL-0.4
  R3_Channel_A1 R3_Channel_A2 R3_Channel_B1 R3_Channel_B2 R3_Channel_C1 R3_Channel_C2 R4_Channel_A1 R4_Channel_A2 R4_Channel_B1 R4_Channel_B2 R4_Channel_C1 R4_Channel_C2: PackageDescription="Axial Device, Thru-Hole; 2 Leads; 0.3 in Pin Spacing", PackageReference=AXIAL-0.3
R37: library part Res2, "Resistor", LatestRevisionDate=17-Jul-2002, LatestRevisionNote="Re-released for DXP Platform.", PackageDescription="Axial Device, Thru-Hole; 2 Leads; 0.4 in Pin Spacing", PackageReference=AXIAL-0.4, Published=8-Jun-2000, Publisher="Altium Limited"
S1: "DIP Switch, 4 Position, SPST", Code_IPC=SOIC127P600-8, Code_JEDEC=MS-012-AA, LatestRevisionDate=29-May-2009, LatestRevisionNote="IPC-7351 Footprint Added.", PackageDescription="8-Pin Small Outline Integrated Circuit 1.27 mm Pitch", PackageReference=SO8, PackageVersion=Dec-2002, Published=24-Mar-1999, Publisher="Altium Limited"
U1: "Quad Low-Power Operational Amplifier", Code_IPC=SOIC127P600-14, ComponentLink1Description="Manufacturer Link", ComponentLink1URL=http://www.onsemi.com/site/products/parametrics/0,4446,251,00.html, ComponentLink2Description=Datasheet, ComponentLink2URL=http://www.onsemi.com/pub/Collateral/LM324-D.PDF, DatasheetVersion=1988, LatestRevisionDate=13-Apr-2006, LatestRevisionNote="IPC-7351 Footprint Added.", PackageDescription="14-Pin Small Outline Integrated Circuit 1.27 mm Pitch", PackageReference=751A-02, PackageVersion=1991, Published=17-Jul-2002, Publisher="Altium Limited"
L1_Driver1 L1_Driver2: Code_IEC=1005, Code_JEITA=0402, LatestRevisionDate=29-May-2009, LatestRevisionNote="IPC-7351 Footprint Added.", PackageDescription="Chip Inductor", PackageReference=0402-A, Published=8-Jun-2000, Publisher="Altium Limited"

## Via types
v1: diameter 1.27, hole 0.711, Top Layer to Bottom Layer, 12 vias
v2: diameter 0.5, hole 0.2, Top Layer to Bottom Layer, 2 vias

## Nets (pads, with @x,y where several pads share a name; then routed paths per layer and width w, separated by ;. In a path a pad name is that pad's centre, name@x,y a point inside that pad or via, vN(x,y) a via of type N, cw(c..) or ccw(c..) an arc to the next point about the centre after c; other vN are vias at no path point)
AGND: C15_Driver1.1 C15_Driver2.1 C20_Driver1.1 C20_Driver2.1 D1_Driver1.28 D1_Driver2.28 R19_Driver1.1 R19_Driver2.1 | length 15.9
  Top Layer w0.5: C20_Driver1.1@108.209,353.131 108.329,353.011 D1_Driver1.28@110.871,353.011 ; 258.52,325.28 C20_Driver2.1@260.045,325.28 ; C20_Driver2.1@260.12,325.275 260.12,328.25 265.327,328.25 ; 265.327,328.325 266.977,329.975 R19_Driver2.1@268.095,329.975
GND: C3_Driver1.2 C3_Driver2.2 C4_Driver1.2 C4_Driver2.2 C5_Driver1.1 C5_Driver2.1 C10_Driver1.2 C10_Driver2.2 C11_Driver1.1 C11_Driver2.1 C18_Driver1.1 C18_Driver2.1 C19_Driver1.1 C19_Driver2.1 C27.1 C28.1 C29.1 C30.1 C31.1 D1_Driver1.57 D1_Driver2.57 D2_Driver1.1 D2_Driver2.1 D3.12 D3.19 D3.31 D3.47 D3.63 D5.2 D6.2 PSWIM1.3 R10_Driver1.2 R10_Driver2.2 R11_Driver1.1 R11_Driver2.1 R12_Driver1.2 R12_Driver2.2 R19_Driver1.2 R19_Driver2.2 R20_Driver1.1 R20_Driver2.1 R23.2 R30.1 R31.1 R32.1 R35.1 R39.2 U1.11 | length 144.7
  Top Layer w0.3: 197.025,321.725 199.525,321.725 199.925,321.325 D3.47@199.925,320.35
  Top Layer w0.5: D1_Driver1.57@117.721,349.336 117.986,349.601 126.722,349.601 ; R10_Driver1.2@126.722,351.114 126.722,349.601 ; C5_Driver1.1@126.738,348.204 126.722,348.22 126.722,349.601 ; 132.945,350.363 129.643,350.363 128.881,349.601 126.722,349.601 ; 136.14,360.777 136.394,360.523 138.023,360.523 138.023,350.617 137.769,350.363 136.245,350.363 136.245,352.246 C4_Driver1.2@136.267,352.268 ; U1.11@177.775,371.025 181.55,371.025 R35.1@181.825,371.3 ; C31.1@195.475,323.275 197.025,321.725 ; C4_Driver2.2@237.688,327.796 C4_Driver2.2@237.795,327.903 ; C3_Driver2.2@237.795,330.15 C3_Driver2.2@237.845,330.2 ; C3_Driver2.2@237.845,330.15 238.17,329.825 v1(240.125,329.825) ; v1@240.293,329.662 241.145,328.81 242.444,328.81 ; C5_Driver2.1@242.428,330.207 242.444,330.191 242.444,328.81 ; R10_Driver2.2@242.444,327.297 242.444,328.81 ; D1_Driver2.57@251.445,329.075 251.18,328.81 242.444,328.81 ; C19_Driver2.1@268.965,323.587 269.568,326.065 269.665,326.462 R19_Driver2.2@269.665,329.48 ; R19_Driver2.2@269.62,329.925 R20_Driver2.1@269.62,332.65
  Top Layer w1: C18_Driver1.1@100.434,380.656 100.534,380.756 C19_Driver1.1@103.059,380.756 ; C10_Driver1.2@132.884,332.981 133.084,332.781 D2_Driver1.1@136.934,332.781 ; C3_Driver1.2@136.14,359.416 136.14,360.777 R11_Driver1.1@136.14,362.101 ; C31.1@195.475,323.275 C31.1@195.5,323.3 195.825,323.625 PSWIM1.3@195.825,325.875 ; D2_Driver2.1@232.32,342.275 v1(235.875,342.275) 238.5,342.275 C10_Driver2.2@238.975,341.8 ; C4_Driver2.2@237.795,327.903 C3_Driver2.2@237.795,330.15 ; C3_Driver2.2@237.845,330.2 R11_Driver2.1@237.845,332.675
  Bottom Layer w1: v1(235.875,342.275) 240.125,338.025 240.125,336.45 ; v1(240.125,329.825) 240.125,336.45 ; v1(269.675,327.975) 269.675,333.325 266.55,336.45 240.125,336.45
  other v2: 245.47,327.825 123.696,350.586
NetC3_Driver1_1: C3_Driver1.1 R5_Driver1.1 | length 5.3
  Top Layer w0.5: C3_Driver1.1@134.34,359.416 134.34,358.237 136.267,356.31 R5_Driver1.1@136.267,354.953
NetC3_Driver2_1: C3_Driver2.1 R5_Driver2.1 | length 3.2
  Top Layer w0.5: R5_Driver2.1@235.003,327.796 234.89,327.909 234.89,329.65 235.39,330.15 C3_Driver2.1@235.995,330.15
NetC4_Driver1_1: C4_Driver1.1 D1_Driver1.2 R5_Driver1.2 | length 11.5
  Top Layer w0.3: D1_Driver1.2@123.871,353.011 123.871,354.497 124.563,355.189 127.484,355.189
  Top Layer w0.5: 127.484,355.189 130.913,355.189 ; C4_Driver1.1@134.467,352.268 R5_Driver1.2@134.467,354.953
NetC4_Driver2_1: C4_Driver2.1 D1_Driver2.2 R5_Driver2.2 | length 11.8
  Top Layer w0.3: 242.104,322.8 244.181,322.8 245.295,323.914 D1_Driver2.2@245.295,325.4
  Top Layer w0.5: R5_Driver2.2@235.003,325.496 C4_Driver2.1@238.113,325.496 ; 237.795,324.75 C4_Driver2.1@237.795,325.1 ; 239.72,324.675 241.545,322.85 241.545,322.8 242.104,322.8
NetC5_Driver1_2: C5_Driver1.2 D1_Driver1.56 | length 5.8
  Top Layer w0.3: D1_Driver1.56@124.371,345.761 124.371,343.956 125.422,343.956
  Top Layer w0.5: 125.422,343.956 126.738,345.272 C5_Driver1.2@126.738,346.404
NetC5_Driver2_2: C5_Driver2.2 D1_Driver2.56 | length 5.1
  Top Layer w0.3: 243.22,333.625 243.67,334.075 244.795,334.075 D1_Driver2.56@244.795,332.65
  Top Layer w0.5: C5_Driver2.2@242.428,332.007 242.428,332.858 243.195,333.625 243.22,333.625
NetC6_Driver1_1: C6_Driver1.1 D1_Driver1.50 D1_Driver1.51 D2_Driver1.2 L1_Driver1.1 | length 39.1
  Top Layer w0.3: D1_Driver1.50@121.371,345.761 121.403,345.729 121.403,344.089 121.871,343.621 ; D1_Driver1.51@121.871,345.761 121.871,343.621 ; 122.928,340.573 121.871,341.63 121.871,343.621
  Top Layer w0.5: 122.928,340.573 124.209,339.292 134.993,339.292 C6_Driver1.1@136.379,337.906 136.379,336.774 137.152,336.001 140.989,336.001 141.434,335.556 D2_Driver1.2@141.434,332.781 141.434,327.231 L1_Driver1.1@140.309,326.106
NetC6_Driver1_2: C6_Driver1.2 D1_Driver1.52 | length 22.1
  Top Layer w0.3: D1_Driver1.52@122.371,345.761 122.371,342.908 123.817,341.462
  Top Layer w0.5: 123.817,341.462 124.96,340.319 138.168,340.319 138.179,340.308 C6_Driver1.2@138.179,337.906
NetC6_Driver2_1: C6_Driver2.1 D1_Driver2.50 D1_Driver2.51 D2_Driver2.2 L1_Driver2.1 | length 34.9
  Top Layer w0.3: 246.72,336.95 247.126,336.95 247.295,336.781 247.295,334.79 ; D1_Driver2.51@247.295,332.65 247.295,334.79 ; D1_Driver2.50@247.795,332.65 247.763,332.682 247.763,334.322 247.295,334.79
  Top Layer w0.5: 228.182,339.3 238.895,339.3 239.545,338.65 C6_Driver2.1@239.545,337.875 ; C6_Driver2.1@239.195,337 246.67,337 246.72,336.95
  Top Layer w1: 228.182,339.775 L1_Driver2.1@228.182,347.625
NetC6_Driver2_2: C6_Driver2.2 D1_Driver2.52 | length 14.1
  Top Layer w0.3: 246.32,335.825 246.795,335.35 D1_Driver2.52@246.795,332.65
  Top Layer w0.5: C6_Driver2.2@237.67,337.875 237.67,335.825 246.32,335.825
NetC9_Driver1_1: C9_Driver1.1 D1_Driver1.46 PMOTOR1_MOSFETs1.1 Q1_Channel_A1.3 Q2_Channel_A1.1 | length 29.3
  Top Layer w0.3: D1_Driver1.46@119.371,345.761 119.371,344.19 119.386,344.175 119.386,343.824 119.403,343.807 119.403,339.169 119.371,339.137 119.371,336.383 120.007,335.747
  Top Layer w0.5: 120.007,335.747 122.166,333.588 C9_Driver1.1@122.166,325.333
  Bottom Layer w1: Q2_Channel_A1.1@148.36,305.359 148.487,305.232 Q1_Channel_A1.3@155.98,305.232
NetC9_Driver1_2: C9_Driver1.2 D1_Driver1.48 | length 22.3
  Top Layer w0.3: D1_Driver1.48@120.371,345.761 120.371,344.604 120.386,344.589 120.386,344.238 120.403,344.221 120.403,339.796 121.404,338.795
  Top Layer w0.5: 121.404,338.795 123.563,336.636 126.992,336.636 126.992,328.254
NetC9_Driver2_1: C9_Driver2.1 D1_Driver2.46 PMOTOR1_MOSFETs2.1 Q1_Channel_A2.3 Q2_Channel_A2.1 | length 82.5
  Top Layer w0.3: 249.159,342.664 249.795,342.028 249.795,339.274 249.763,339.242 249.763,334.604 249.78,334.587 249.78,334.236 249.795,334.221 D1_Driver2.46@249.795,332.65
  Top Layer w0.5: 247,344.823 249.159,342.664 ; 247,344.873 C9_Driver2.1@247,347.4
  Top Layer w1: Q1_Channel_A2.3@205.895,371.193 208.182,371.193 v1(208.25,371.125) 208.25,374.775
  Bottom Layer w0.5: 220.025,361.125 221.675,359.475 221.675,357.625 229.175,350.125 243.35,350.125 246.125,347.35 C9_Driver2.1@246.98,347.35
  Bottom Layer w1: v1@207.8,371.125 207.8,362.4 209.075,361.125 220.025,361.125 ; v1(208.25,371.125) v1@208.4,371.125 ; v1@208.4,371.193 213.388,371.193 Q2_Channel_A2.1@213.515,371.066
NetC9_Driver2_2: C9_Driver2.2 D1_Driver2.48 | length 19.1
  Top Layer w0.3: 247.762,339.616 248.763,338.615 248.763,334.19 248.78,334.173 248.78,333.822 248.795,333.807 D1_Driver2.48@248.795,332.65
  Top Layer w0.5: C9_Driver2.2@239.235,347.3 240.078,347.3 247.762,339.616
NetC11_Driver1_2: C11_Driver1.2 D1_Driver1.13 | length 23.8
  Top Layer w0.3: D1_Driver1.13@118.371,353.011 118.371,363.931
  Top Layer w0.5: 118.371,363.931 118.371,372.118 120.309,374.056 C11_Driver1.2@120.309,376.056
NetC11_Driver2_2: C11_Driver2.2 D1_Driver2.13 | length 17.6
  Top Layer w0.3: 250.795,314.48 D1_Driver2.13@250.795,325.4
  Top Layer w0.5: 250.795,307.775 250.795,314.48
NetC12_Driver1_1: C12_Driver1.1 D1_Driver1.15 | length 31
  Top Layer w0.3: 115.971,364.431 115.971,363.594 116.971,362.594 116.971,358.019 117.371,357.619 D1_Driver1.15@117.371,353.011
  Top Layer w0.5: 115.971,364.431 115.971,381.933 117.044,383.006
NetC12_Driver1_2: C12_Driver1.2 D1_Driver1.14 | length 33.4
  Top Layer w0.3: 117.171,364.231 117.171,363.519 117.671,363.019 117.671,358.169 117.871,357.969 D1_Driver1.14@117.871,353.011
  Top Layer w0.5: 117.171,364.231 117.171,379.818 120.359,383.006 122.124,383.006
NetC12_Driver2_1: C12_Driver2.1 D1_Driver2.15 | length 16.8
  Top Layer w0.3: D1_Driver2.15@251.795,325.4 251.795,320.792 252.195,320.392 252.195,315.817 253.195,314.817
  Top Layer w0.5: C12_Driver2.1@252.22,310.65 253.44,310.65 253.62,310.83 253.62,314.392 253.195,314.817
NetC12_Driver2_2: C12_Driver2.2 D1_Driver2.14 | length 13.2
  Top Layer w0.3: D1_Driver2.14@251.295,325.4 251.295,320.442 251.495,320.242 251.495,315.392 251.995,314.892 C12_Driver2.2@251.995,312.525
NetC13_Driver1_1: C13_Driver1.1 D1_Driver1.41 PMOTOR1_MOSFETs1.2 Q1_Channel_B1.3 Q2_Channel_B1.1 | length 21.3
  Top Layer w0.3: 116.578,336.255 116.871,336.548 116.871,340.172 116.903,340.204 116.903,342.772 116.886,342.788 116.886,343.139 116.871,343.154 D1_Driver1.41@116.871,345.761
  Top Layer w0.5: 113.784,333.461 116.578,336.255
  Bottom Layer w1: Q2_Channel_B1.1@122.185,304.609 122.312,304.482 Q1_Channel_B1.3@129.805,304.482
NetC13_Driver1_2: C13_Driver1.2 D1_Driver1.43 | length 20.8
  Top Layer w0.3: 116.959,333.842 117.871,334.754 117.871,339.758 117.903,339.79 117.903,343.186 117.886,343.202 117.886,343.553 117.871,343.568 D1_Driver1.43@117.871,345.761
  Top Layer w0.5: 115.562,325.968 115.562,332.445 116.959,333.842
NetC13_Driver2_1: C13_Driver2.1 D1_Driver2.41 PMOTOR1_MOSFETs2.2 Q1_Channel_B2.3 Q2_Channel_B2.1 | length 67
  Top Layer w0.3: D1_Driver2.41@252.295,332.65 252.295,335.257 252.28,335.272 252.28,335.623 252.263,335.639 252.263,338.207 252.295,338.239 252.295,341.863 252.588,342.156
  Top Layer w0.5: Q2_Channel_B2.1@239.293,371.152 239.293,368.757 240.025,368.025 240.025,364.05 243.8,360.275 245.25,360.275 255.525,350 255.525,349.275 ; 252.588,342.156 254.695,344.263 ; 254.714,344.281 254.695,344.263 ; C13_Driver2.1@258.805,349.275 255.525,349.275 ; 254.695,344.263 254.695,348.95 255.02,349.275 255.525,349.275
  Top Layer w1: Q2_Channel_B2.1@239.293,371.152 239.293,372.218 240.325,373.25 ; 272.075,373.25 275.45,369.875 PMOTOR1_MOSFETs2.2@276.475,369.875
  Bottom Layer w1: Q1_Channel_B2.3@231.673,371.279 239.166,371.279 Q2_Channel_B2.1@239.293,371.152